# Altium PCB DIOT_Sampler.PCBDOC (part 1 of 8)
Units mm, origin at the board's own origin, x right, y up, seen from the top; angles counter-clockwise.
Board outline 221.17 x 100 mm, 4 copper layers (Top, GP1(GND), L3, Bot), stack 1.648 mm thick; 666 components, 413 nets, 2132 pads, 925 vias.
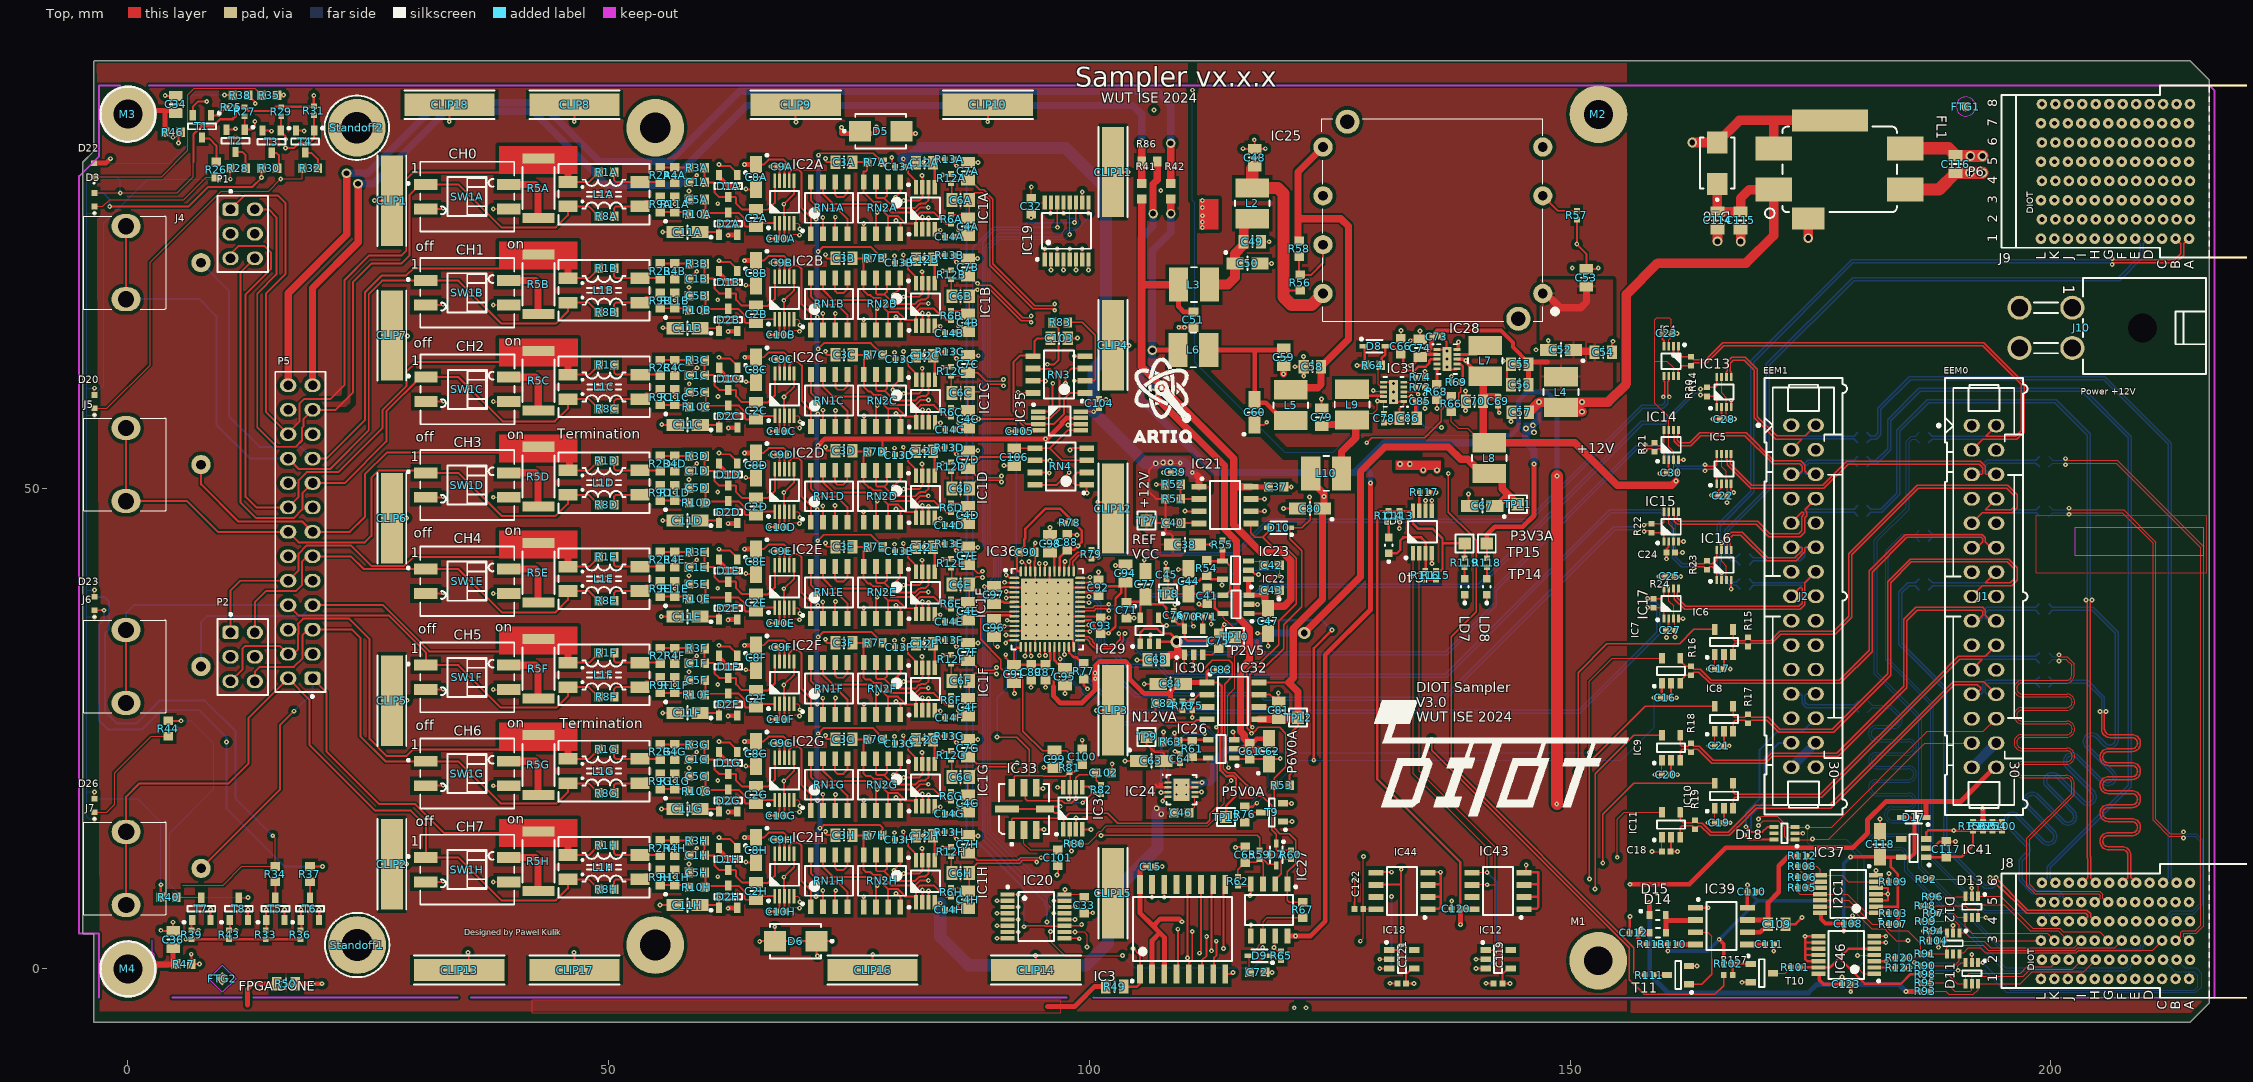
[diagram p0: Top view]
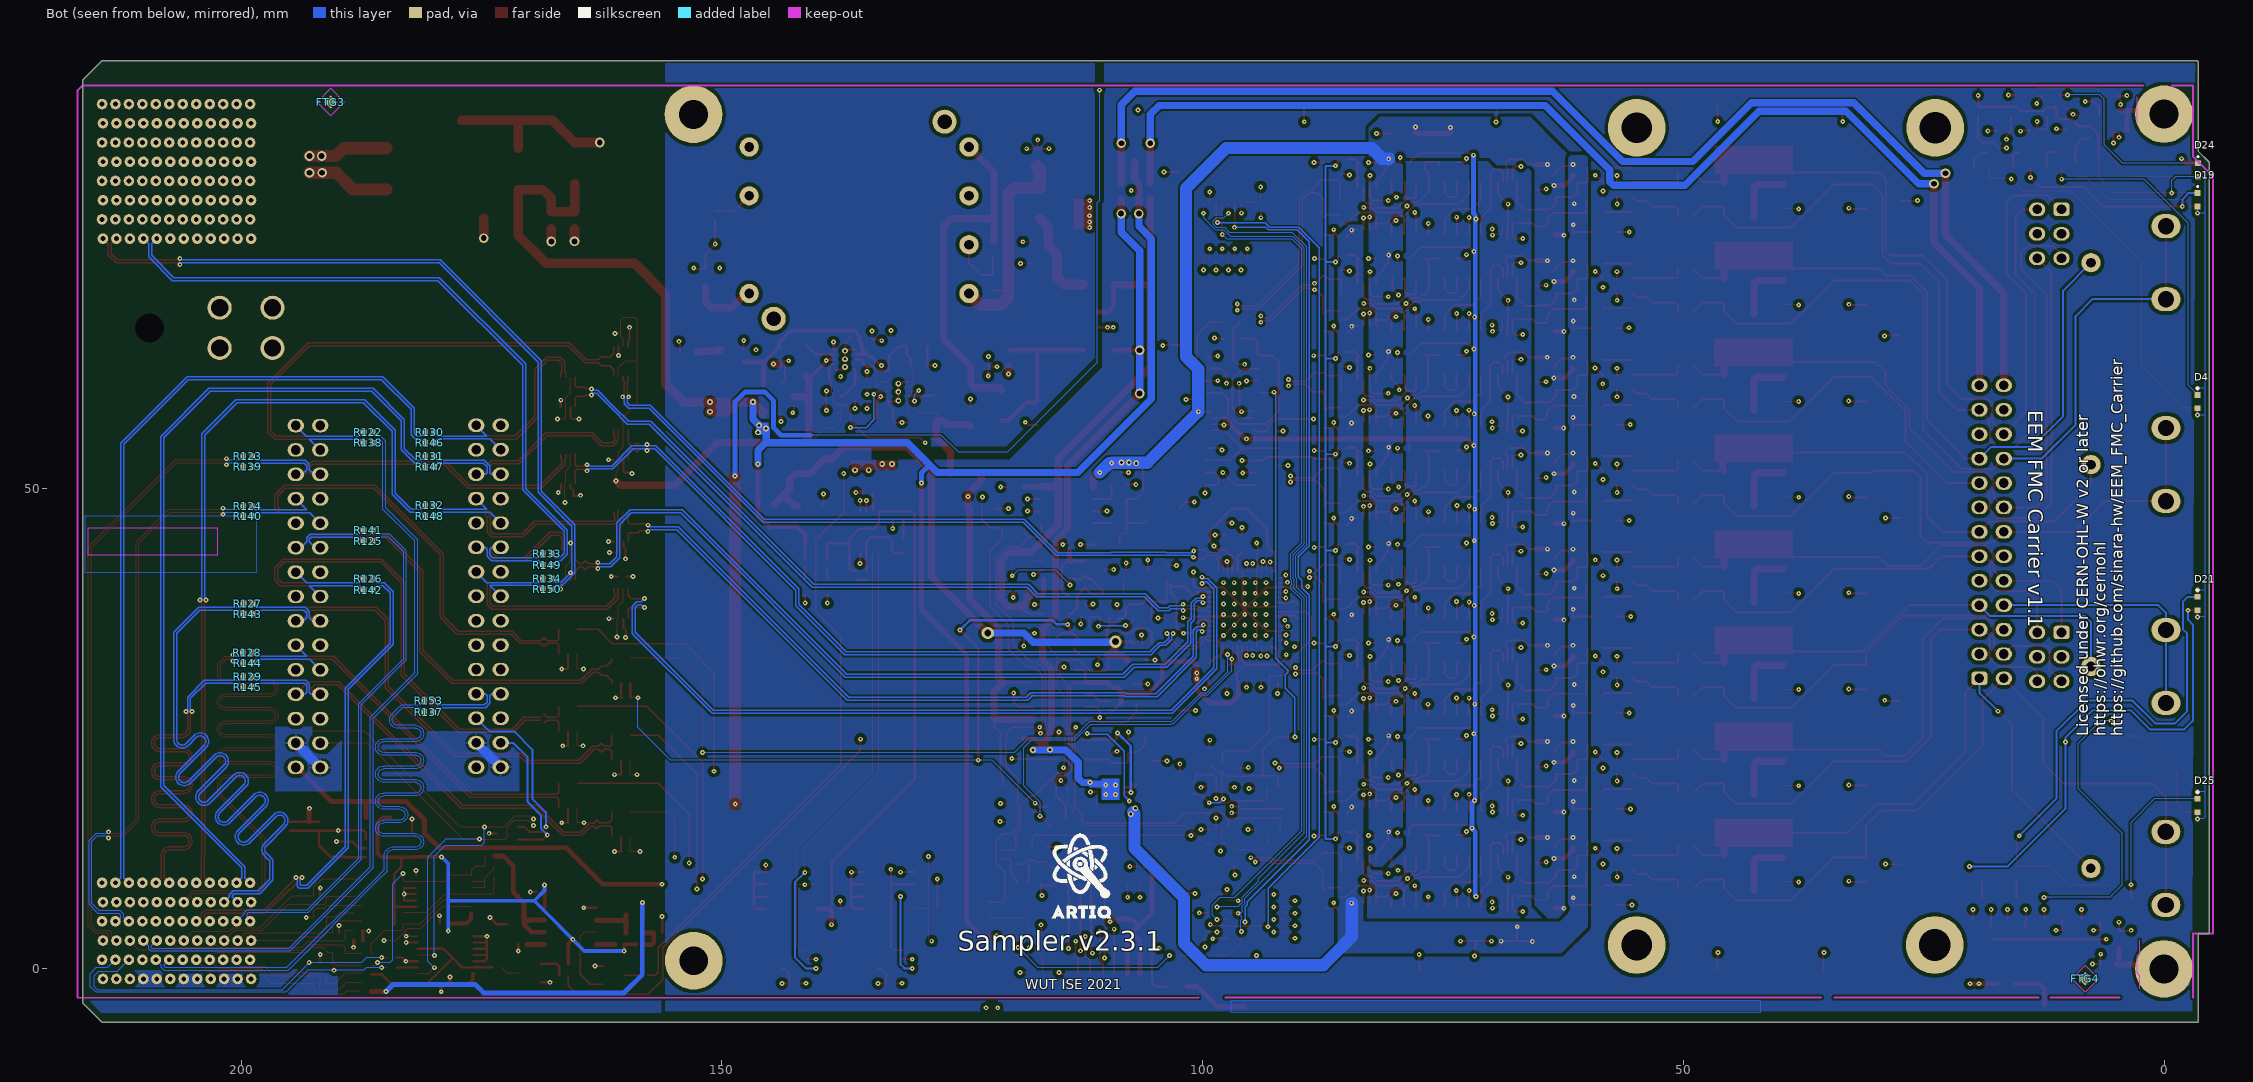
[diagram p1: Bot view, seen from below]
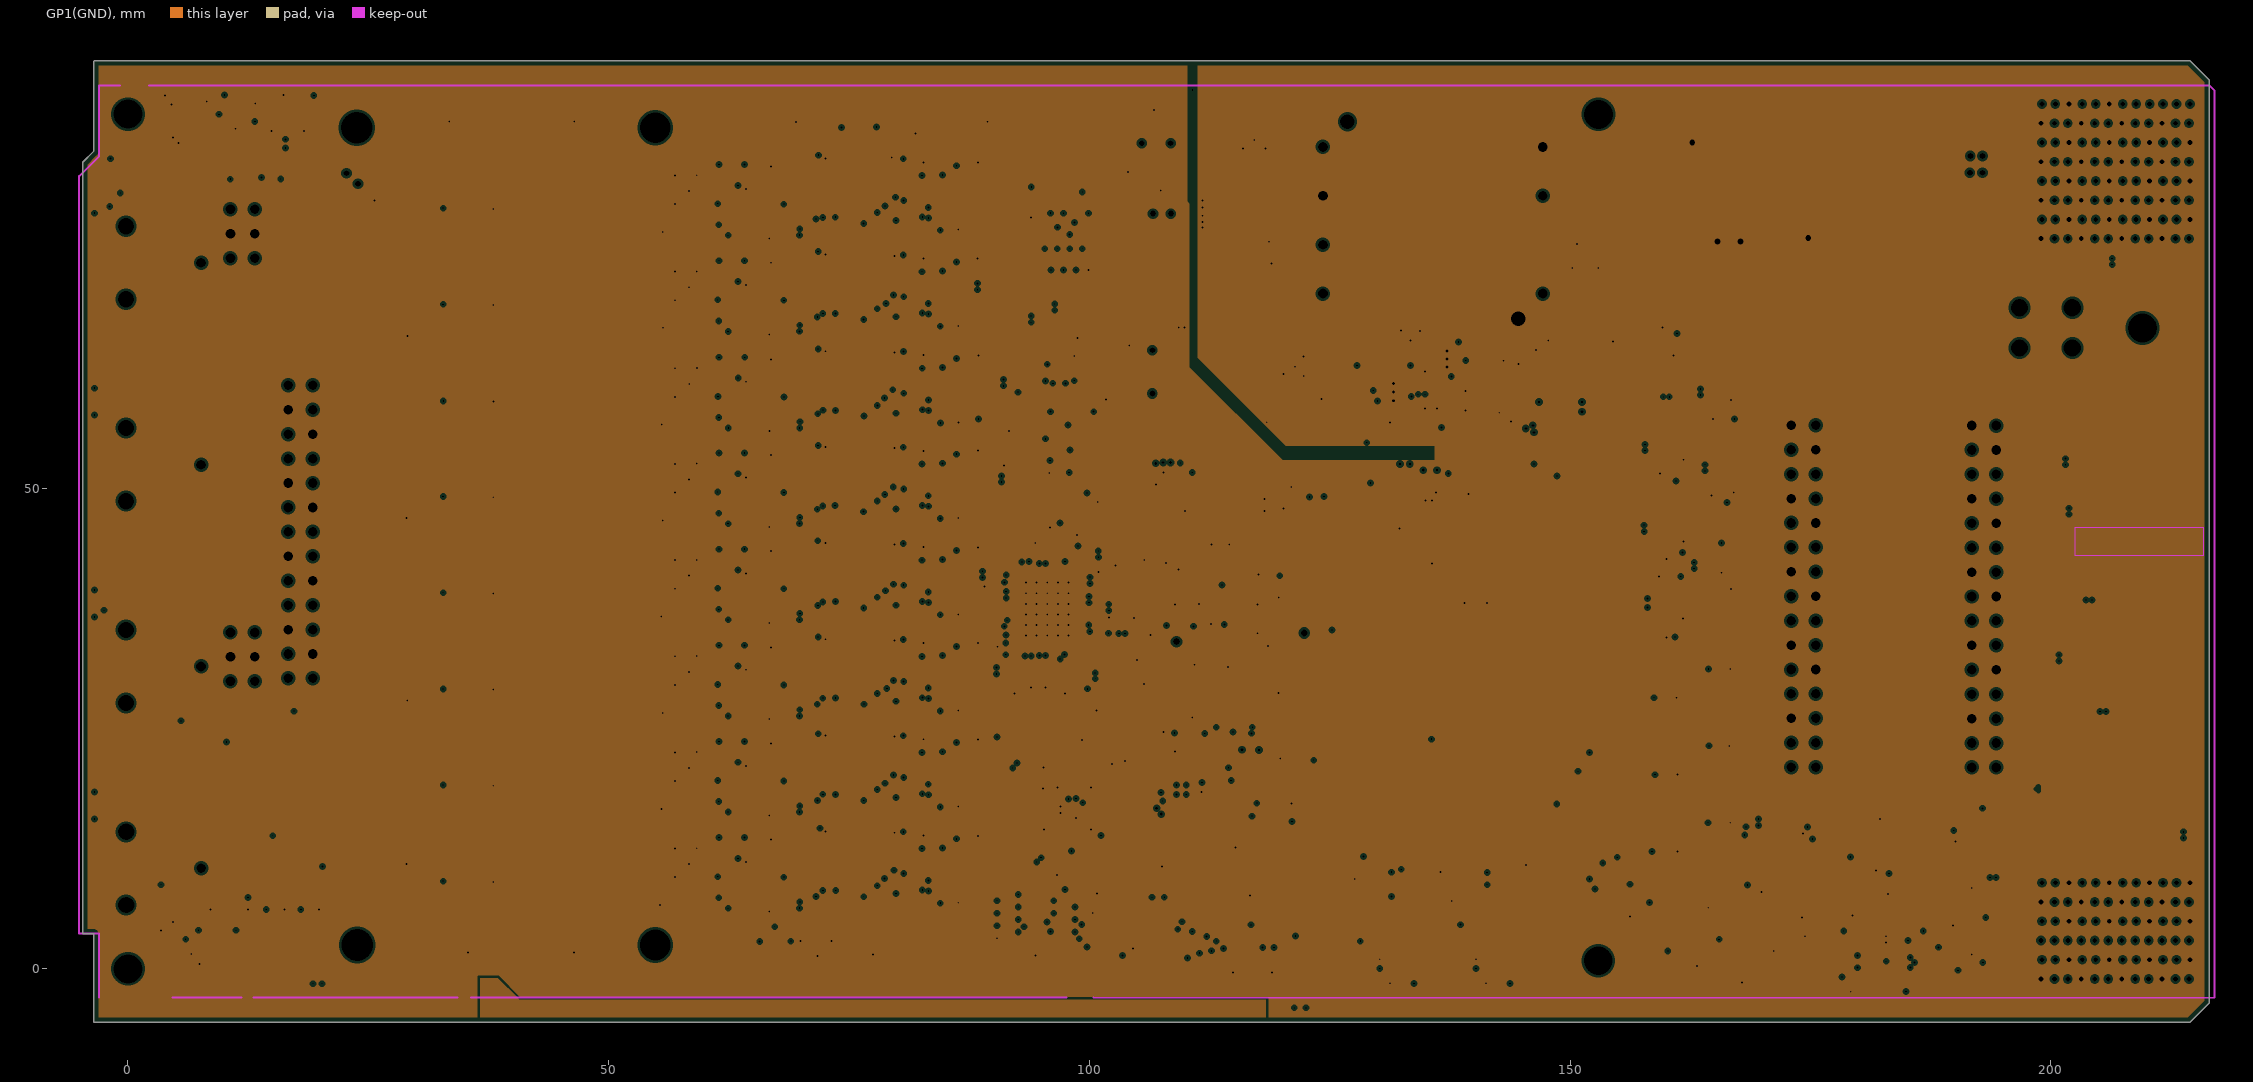
[diagram p2: GP1(GND), clearances drawn from the general rule]
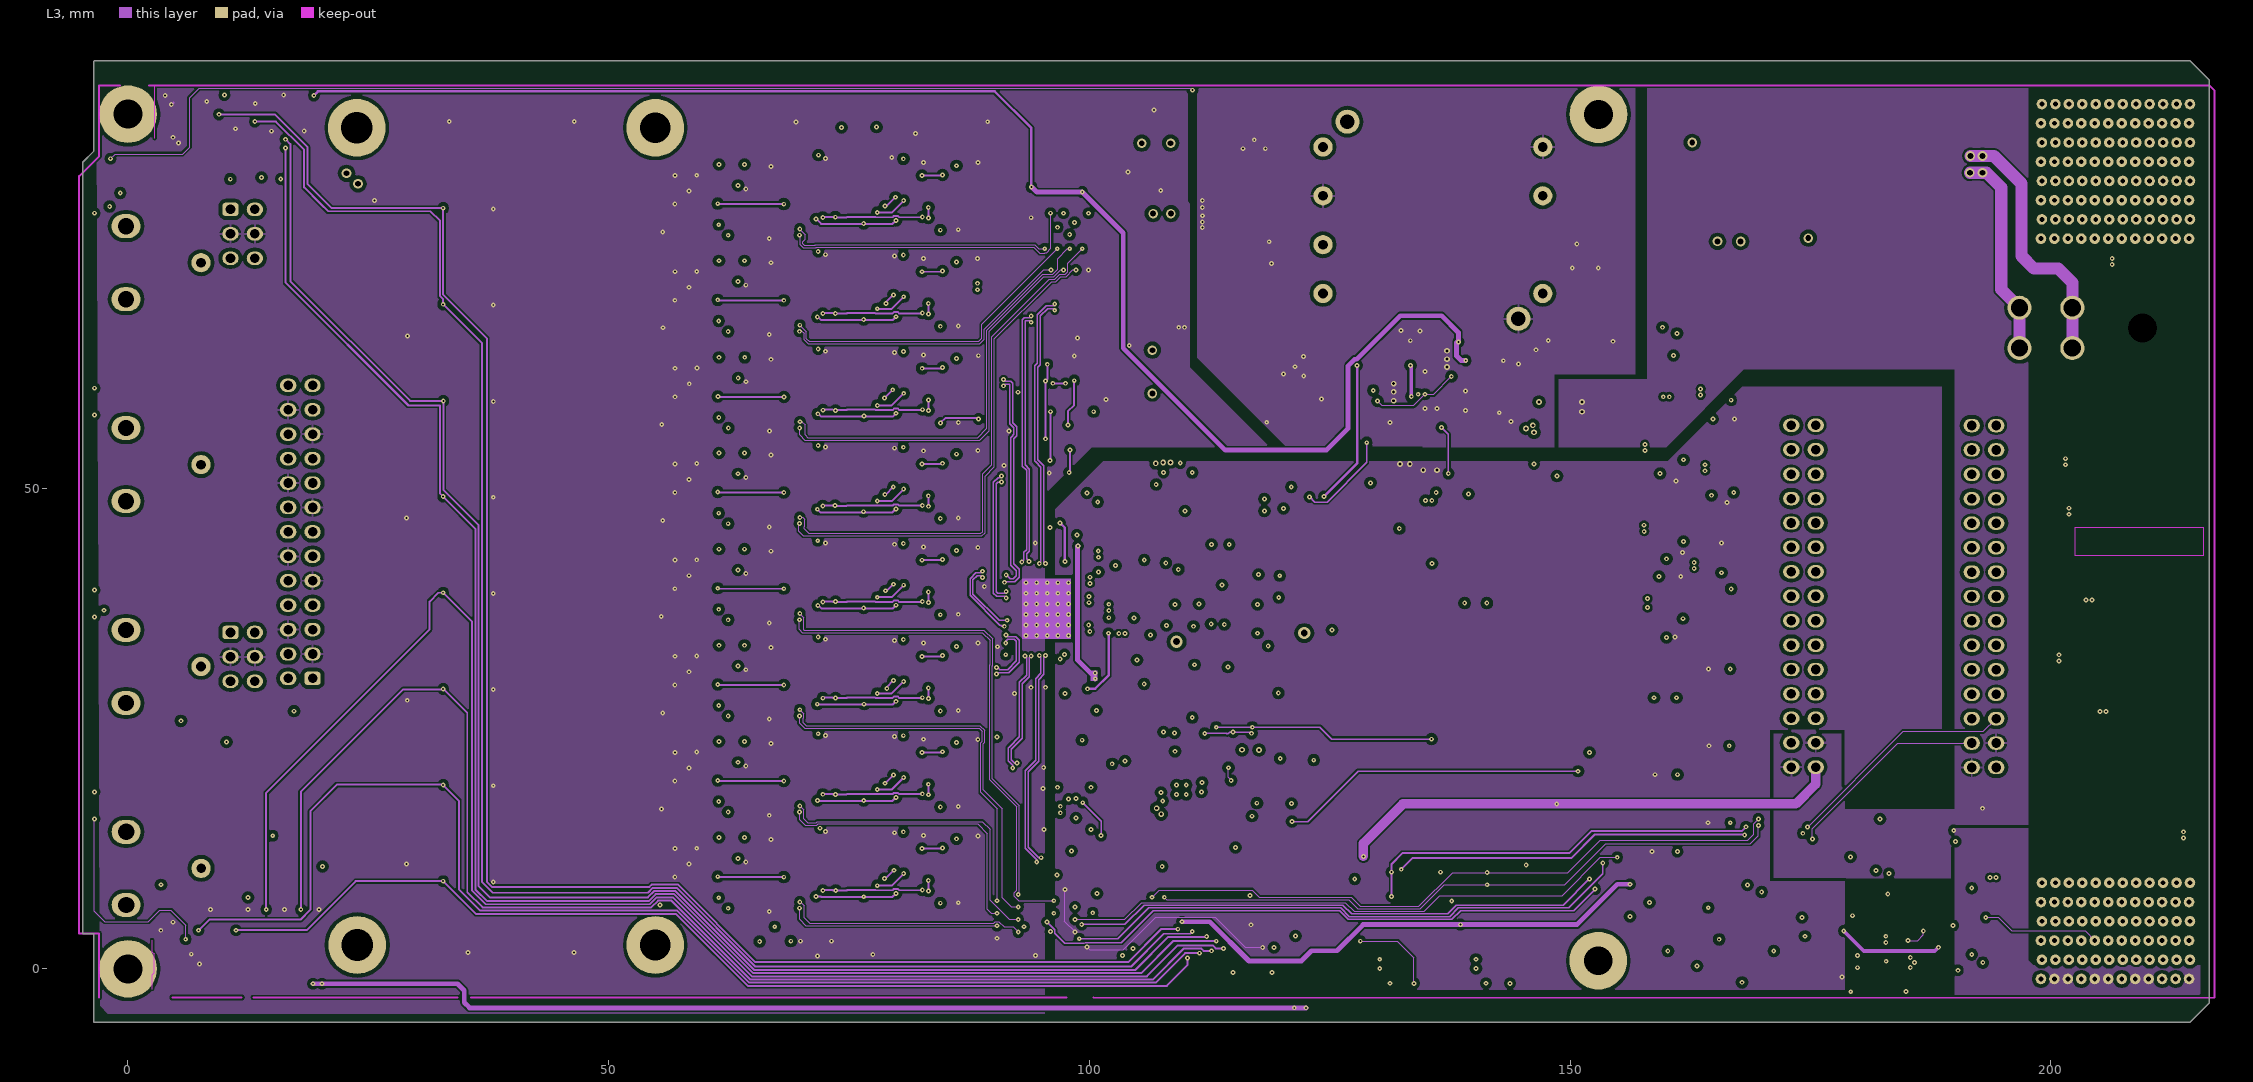
[diagram p3: L3]
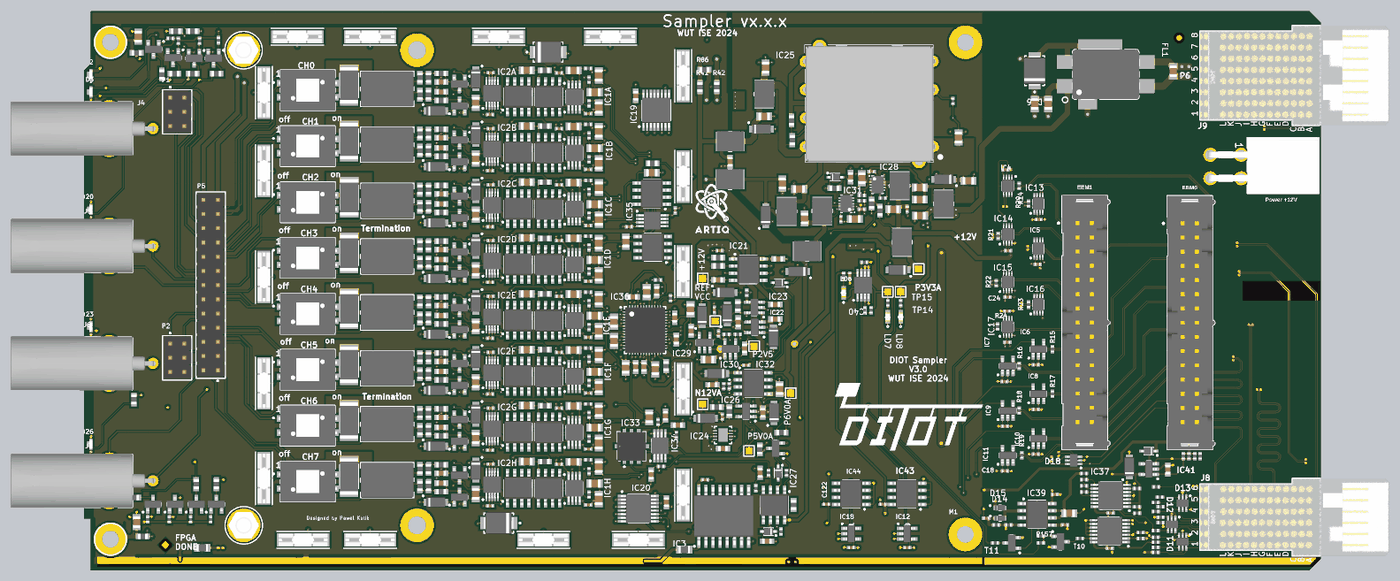
[diagram p10: 3D render of the assembled board from above, using the file's embedded part models]
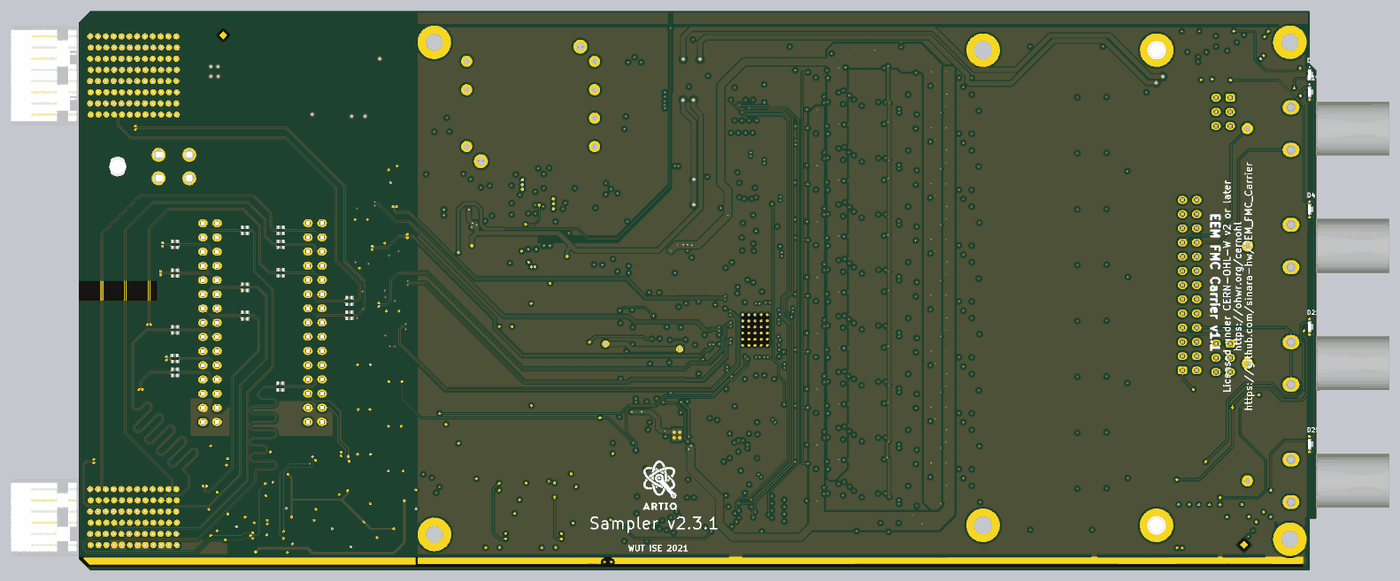
[diagram p11: 3D render of the assembled board from below, using the file's embedded part models]

## Layer stack, top to bottom
TopSolder: solder mask 0.0102, Solder Resist, Dk 3.5
Top: signal copper 0.058
Dielectric1: core 0.18, FR-4, Dk 4.8
GP1(GND): plane copper 0.036, net GND
Dielectric 3: prepreg 1.1, Dk 4.2
L3: signal copper 0.036
Dielectric2: core 0.18, FR-4, Dk 4.2
Bot: signal copper 0.058
BottomSolder: solder mask 0.0102, Solder Resist, Dk 3.5

## Board outline
-4.7,3.65 -4.7,82.695 -4.7,83.895 -3.57,85.025 -3.57,94.349 -3.469,94.45 214.469,94.45 216.469,92.45 216.469,-3.55 214.469,-5.55 -3.57,-5.55 -3.57,3.65

## Design rules (kind name [scope] priority, off if disabled: settings)
AcuteAngle [All] p1: minimum=6.00000000000000E+0001 checktracksonly=FALSE
Clearance Clearance_DIFF [(InDifferentialPairClass('All Differential Pairs'))] p1: gap=0.127 ignorepadtopadclearanceinfootprint=FALSE except(0: Arc-Hole Track-Hole SMDPad-Hole THPad-Hole Via-Hole Fill-Hole Poly-Hole Region-Hole Text-Hole; 0.254: Arc-Poly Track-Poly SMDPad-Poly THPad-Poly Via-Poly Fill-Poly Poly-Poly Poly-Region Poly-Text)
Clearance [All] p2: gap=0.127 ignorepadtopadclearanceinfootprint=FALSE except(0: Arc-Hole Track-Hole SMDPad-Hole THPad-Hole Via-Hole Fill-Hole Poly-Hole Region-Hole Text-Hole; 0.203: Track-Poly; 0.381: Arc-Poly SMDPad-Poly THPad-Poly Via-Poly Fill-Poly Poly-Poly)
ComponentClearance [All] p1 off: gap=0.254 collisioncheckmode=3 verticalgap=0.254 showdistances=FALSE
DiffPairsRouting [All] p1: maxlimit=0.178 minlimit=0.152 mostfreqgap=0.152 toplayer_minwidth=0.127 toplayer_maxwidth=0.152 toplayer_prefwidth=0.152 midlayer1_minwidth=0.127 midlayer1_maxwidth=0.152 midlayer1_prefwidth=0.152 bottomlayer_minwidth=0.127 bottomlayer_maxwidth=0.152 bottomlayer_prefwidth=0.152 maxuncoupledlength=12.7
FabricationTestPointUsage TestPointUsage [All] p1: valid=0 allowmultiple=FALSE
FabricationTestpoint Testpoint [All] p1: side=3 testpointundercomponent=TRUE minsize=1.016 maxsize=2.54 preferedsize=1.524 minholesize=0.508 maxholesize=1.016 preferedholesize=0.813 testpointgrid=0.025 allowsidetop=TRUE allowsidebottom=TRUE usegrid=TRUE gridtolerance=0
Height [All] p1 off: minheight=0 maxheight=25.4 prefheight=12.7
HoleSize [All] p1: absolutevalues=TRUE maxlimit=3.81 minlimit=0.025 maxpercent=80.000 minpercent=20.000
HoleToHoleClearance [All] p1: gap=0.025 allowstackedmicrovias=TRUE
MinimumSolderMaskSliver [All] p1: minsoldermaskwidth=0
PlaneClearance [All] p1: clearance=0.254
PlaneConnect [All] p1: planeconnectstyle=Direct reliefexpansion=0.508 reliefentries=4 reliefconductorwidth=0.254 reliefairgap=0.254
PolygonConnect "AirMax 2 Polygon" [All vs HasFootprint('AMPHENOL_10052825-101LF') or HasFootprint('AMPHENOL_10052838-101LF')] p1: connectstyle=Direct reliefconductorwidth=0.254 reliefentries=4 polygonreliefangle="90 Angle" airgapwidth=0.254
PolygonConnect PolygonConnect_pad [(InPadClass('All Pads'))] p2: connectstyle=Relief reliefconductorwidth=0.254 reliefentries=4 polygonreliefangle="90 Angle" airgapwidth=0.254
PolygonConnect [All] p3: connectstyle=Direct reliefconductorwidth=0.254 reliefentries=4 polygonreliefangle="45 Angle" airgapwidth=0.254
RoutingVias [All] p1: holewidth=0.2 width=0.5 viastyle="Through Hole" minholewidth=0.2 minwidth=0.5 maxholewidth=0.711 maxwidth=1.27
SilkToSilkClearance [All] p1: silktosilkclearance=0
SilkToSolderMaskClearance SilkscreenOverComponentPads [IsPad] p1: minsilkscreentomaskgap=0 clearancetoexposedcopper=TRUE
SolderMaskExpansion [All] p1: expansion=0.051 istentingtop=FALSE
SupplyNets "Schematic Supply Nets_1" [InNet('CHASSIS')] p1: voltage=0.000
SupplyNets "Schematic Supply Nets_8" [InNet('P3V3_MP2')] p2: voltage=0.000
SupplyNets "Schematic Supply Nets_26" [InNet('P13V0S')] p3: voltage=0.000
SupplyNets "Schematic Supply Nets_25" [InNet('N12V0A')] p4: voltage=0.000
SupplyNets "Schematic Supply Nets_24" [InNet('P12V0_DIOT')] p5: voltage=0.000
SupplyNets "Schematic Supply Nets_23" [InNet('P3V3_DIOT')] p6: voltage=0.000
SupplyNets "Schematic Supply Nets_21" [InNet('P13V0')] p7: voltage=0.000
SupplyNets "Schematic Supply Nets_20" [InNet('P3V3')] p8: voltage=0.000
SupplyNets "Schematic Supply Nets_19" [InNet('P5V0A')] p9: voltage=0.000
SupplyNets "Schematic Supply Nets_18" [InNet('P3V3_MP')] p10: voltage=0.000
SupplyNets "Schematic Supply Nets_16" [InNet('REF_P2V048')] p11: voltage=0.000
SupplyNets "Schematic Supply Nets_14" [InNet('REF_P1V7066')] p12: voltage=0.000
SupplyNets "Schematic Supply Nets_13" [InNet('P6V0A')] p13: voltage=0.000
SupplyNets "Schematic Supply Nets_11" [InNet('REF_VCC')] p14: voltage=0.000
SupplyNets "Schematic Supply Nets_10" [InNet('GND')] p15: voltage=0.000
SupplyNets "Schematic Supply Nets_9" [InNet('P2V5A')] p16: voltage=0.000
SupplyNets "Schematic Supply Nets_7" [InNet('N13V0')] p17: voltage=0.000
SupplyNets "Schematic Supply Nets_6" [InNet('P12V0A')] p18: voltage=0.000
SupplyNets "Schematic Supply Nets_5" [InNet('P3V3A')] p19: voltage=0.000
SupplyNets "Schematic Supply Nets_4" [InNet('N13V0S')] p20: voltage=0.000
SupplyNets "Schematic Supply Nets_3" [InNet('P12V0')] p21: voltage=0.000
SupplyNets "Schematic Supply Nets_2" [InNet('REF_P4V096')] p22: voltage=0.000
SupplyNets "Schematic Supply Nets" [InNet('P6V0')] p23: voltage=0.000
Width [All] p1: maxlimit=1.27 minlimit=0.127 preferedwidth=0.127
18 further rules are at their usual default settings.

## Classes and differential pairs
net class ADC: ADC_CLKOUT_N ADC_CLKOUT_P ADC_SCK_N ADC_SCK_P ADC_SDOA_N ADC_SDOA_P ADC_SDOB_N ADC_SDOB_P ADC_SDOC_N ADC_SDOC_P ADC_SDOD_N ADC_SDOD_P
net class I2C: BP_I2C.SCL BP_I2C.SDA EEM0_I2C.SCL EEM0_I2C.SDA I2C_SCL1 I2C_SDA1 Switch_I2C.SCL Switch_I2C.SDA
net class BS_LVDS: BP_IO.LVDS_N0 BP_IO.LVDS_N1 BP_IO.LVDS_N2 BP_IO.LVDS_N3 BP_IO.LVDS_N4 BP_IO.LVDS_N5 BP_IO.LVDS_N6 BP_IO.LVDS_N7 BP_IO.LVDS_N8 BP_IO.LVDS_N9 BP_IO.LVDS_N10 BP_IO.LVDS_N11 BP_IO.LVDS_N12 BP_IO.LVDS_N13 BP_IO.LVDS_N14 BP_IO.LVDS_N15 BP_IO.LVDS_P0 BP_IO.LVDS_P1 BP_IO.LVDS_P2 BP_IO.LVDS_P3 BP_IO.LVDS_P4 BP_IO.LVDS_P5 BP_IO.LVDS_P6 BP_IO.LVDS_P7 BP_IO.LVDS_P8 BP_IO.LVDS_P9 BP_IO.LVDS_P10 BP_IO.LVDS_P11 BP_IO.LVDS_P12 BP_IO.LVDS_P13 BP_IO.LVDS_P14 BP_IO.LVDS_P15
net class POWER: P2V5A P3V3 P3V3_DIOT P3V3_MP P3V3_MP2 P3V3A P5V0A P6V0 P6V0A P12V0 P12V0_DIOT P12V0A P13V0 P13V0S
net class LVDS_DUAL_P[0..4]: LVDS_DUAL_P0 LVDS_DUAL_P1 LVDS_DUAL_P2 LVDS_DUAL_P3 LVDS_DUAL_P4
net class LVDS_DUAL_N[0..4]: LVDS_DUAL_N0 LVDS_DUAL_N1 LVDS_DUAL_N2 LVDS_DUAL_N3 LVDS_DUAL_N4
net class SHARED_BUS_[0..4]: SHARED_BUS_0 SHARED_BUS_1 SHARED_BUS_2 SHARED_BUS_3 SHARED_BUS_4
net class GA[0..3]: GA0 GA1 GA2 GA3
net class EEM_IO.LVDS_P[0..15]: EEM_IO.LVDS_P5 EEM_IO.LVDS_P6 EEM_IO.LVDS_P7 EEM_IO.LVDS_P8 EEM_IO.LVDS_P9 EEM_IO.LVDS_P10 EEM_IO.LVDS_P11 EEM_IO.LVDS_P12 EEM_IO.LVDS_P13 EEM_IO.LVDS_P14 EEM_IO.LVDS_P15
net class EEM_IO.LVDS_N[0..15]: EEM_IO.LVDS_N5 EEM_IO.LVDS_N6 EEM_IO.LVDS_N7 EEM_IO.LVDS_N8 EEM_IO.LVDS_N9 EEM_IO.LVDS_N10 EEM_IO.LVDS_N11 EEM_IO.LVDS_N12 EEM_IO.LVDS_N13 EEM_IO.LVDS_N14 EEM_IO.LVDS_N15
net class BP_IO.LVDS_P[0..15]: BP_IO.LVDS_P0 BP_IO.LVDS_P1 BP_IO.LVDS_P2 BP_IO.LVDS_P3 BP_IO.LVDS_P4 BP_IO.LVDS_P5 BP_IO.LVDS_P6 BP_IO.LVDS_P7 BP_IO.LVDS_P8 BP_IO.LVDS_P9 BP_IO.LVDS_P10 BP_IO.LVDS_P11 BP_IO.LVDS_P12 BP_IO.LVDS_P13 BP_IO.LVDS_P14 BP_IO.LVDS_P15
net class BP_IO.LVDS_N[0..15]: BP_IO.LVDS_N0 BP_IO.LVDS_N1 BP_IO.LVDS_N2 BP_IO.LVDS_N3 BP_IO.LVDS_N4 BP_IO.LVDS_N5 BP_IO.LVDS_N6 BP_IO.LVDS_N7 BP_IO.LVDS_N8 BP_IO.LVDS_N9 BP_IO.LVDS_N10 BP_IO.LVDS_N11 BP_IO.LVDS_N12 BP_IO.LVDS_N13 BP_IO.LVDS_N14 BP_IO.LVDS_N15
component class U_PWR_Supply: C113 C114 C115 C116 C117 C118 D16 D17 FL1 IC40 IC41 J10 LD6 LD7 LD8 R114 R115 R116 R117 R118 R119 TP14 TP15
component class U_LVDS_EEM0: C15 C16 C17 C18 C19 C20 C21 C22 C23 C24 C25 C27 C28 C30 C119 C120 C121 C122 C123 D18 IC3 IC4 IC5 IC6 IC7 IC8 IC9 IC10 IC11 IC12 IC13 IC14 IC15 IC16 IC17 IC18 IC43 IC44 IC46 IC3000 IC3003 J1 J2 R14 R15 R16 R17 R18 R19 R20 R21 R22 R24 R100 R120 R121 R122 R123 R124 R125 R126 R127 R128 R129 R130 R131 R132 R133 R134 R137 R138 R139 R140 R141 R142 R143 R144 R145 R146 R147 R148 R149 R150 R153 R154 R155 R156
component class CPCIS_Connectors_P1_P6: C108 C109 C110 C111 C112 D11 D12 D13 D14 D15 IC37 IC39 J8 J9 R48 R90 R91 R92 R93 R94 R95 R96 R97 R98 R99 R101 R102 R103 R104 R105 R106 R107 R108 R109 R110 R111 R112 R113 T10 T11
net class TERM_STAT[7..0]: TERM_STAT0 TERM_STAT1 TERM_STAT2 TERM_STAT3 TERM_STAT4 TERM_STAT5 TERM_STAT6 TERM_STAT7
channel class Input_channel: U_Input_channel1 U_Input_channel2 U_Input_channel3 U_Input_channel4 U_Input_channel5 U_Input_channel6 U_Input_channel7 U_Input_channel8
component class U_Supply: C37 C38 C39 C40 C41 C42 C43 C44 C45 C46 C47 C48 C49 C50 C51 C52 C53 C54 C55 C56 C57 C58 C59 C60 C61 C62 C63 C64 C65 C66 C67 C68 C69 C70 C71 C72 C73 C74 C75 C76 C77 C78 C79 C80 C81 C82 C83 C84 C85 C86 D5 D6 D7 D8 D9 D10 IC21 IC22 IC23 IC24 IC25 IC26 IC27 IC28 IC29 IC30 IC31 IC32 L2 L3 L4 L5 L6 L7 L8 L9 L10 R51 R52 R53 R54 R55 R56 R57 R58 R59 R60 R61 R62 R63 R64 R65 R66 R67 R68 R69 R70 R71 R72 R73 R74 R75 R157 TP7 TP8 TP9 TP10 TP11 TP12 TP13
component class U_Input_channel8: C1H C2H C3H C4H C5H C6H C7H C8H C9H C10H C11H C12H C13H C14H D1H D2H IC1H IC2H L1H R1H R2H R3H R4H R5H R6H R7H R8H R9H R10H R11H R12H R13H RN1H RN2H SW1H
component class U_Input_channel7: C1G C2G C3G C4G C5G C6G C7G C8G C9G C10G C11G C12G C13G C14G D1G D2G IC1G IC2G L1G R1G R2G R3G R4G R5G R6G R7G R8G R9G R10G R11G R12G R13G RN1G RN2G SW1G
component class U_Input_channel6: C1F C2F C3F C4F C5F C6F C7F C8F C9F C10F C11F C12F C13F C14F D1F D2F IC1F IC2F L1F R1F R2F R3F R4F R5F R6F R7F R8F R9F R10F R11F R12F R13F RN1F RN2F SW1F
component class U_Input_channel5: C1E C2E C3E C4E C5E C6E C7E C8E C9E C10E C11E C12E C13E C14E D1E D2E IC1E IC2E L1E R1E R2E R3E R4E R5E R6E R7E R8E R9E R10E R11E R12E R13E RN1E RN2E SW1E
component class U_Input_channel4: C1D C2D C3D C4D C5D C6D C7D C8D C9D C10D C11D C12D C13D C14D D1D D2D IC1D IC2D L1D R1D R2D R3D R4D R5D R6D R7D R8D R9D R10D R11D R12D R13D RN1D RN2D SW1D
component class U_Input_channel3: C1C C2C C3C C4C C5C C6C C7C C8C C9C C10C C11C C12C C13C C14C D1C D2C IC1C IC2C L1C R1C R2C R3C R4C R5C R6C R7C R8C R9C R10C R11C R12C R13C RN1C RN2C SW1C
component class U_Input_channel2: C1B C2B C3B C4B C5B C6B C7B C8B C9B C10B C11B C12B C13B C14B D1B D2B IC1B IC2B L1B R1B R2B R3B R4B R5B R6B R7B R8B R9B R10B R11B R12B R13B RN1B RN2B SW1B
component class U_Input_channel1: C1A C2A C3A C4A C5A C6A C7A C8A C9A C10A C11A C12A C13A C14A D1A D2A IC1A IC2A L1A R1A R2A R3A R4A R5A R6A R7A R8A R9A R10A R11A R12A R13A RN1A RN2A SW1A
component class U_ADC_8CH: C87 C88 C89 C90 C91 C92 C93 C94 C95 C96 C97 C98 C99 C100 C101 C102 C103 C104 C105 C106 IC33 IC34 IC35 IC36 R76 R77 R78 R79 R80 R81 R82 R83 RN3 RN4 T9
component class Sampler: C32 C33 C34 C36 CLIP1 CLIP2 CLIP3 CLIP4 CLIP5 CLIP6 CLIP7 CLIP8 CLIP9 CLIP10 CLIP11 CLIP12 CLIP13 CLIP14 CLIP15 CLIP16 CLIP17 CLIP18 D3 D4 D19 D20 D21 D22 D23 D24 D25 D26 FTG1 FTG2 FTG3 FTG4 IC19 IC20 J4 J5 J6 J7 M1 M2 M3 M4 NUT1 NUT2 P1 P2 P5 R25 R26 R27 R28 R29 R30 R31 R32 R33 R34 R35 R36 R37 R38 R39 R40 R41 R42 R43 R44 R46 R47 R49 R50 R86 SCREW1 SCREW2 Standoff1 Standoff2 T1 T2 T3 T4 T5 T6 T7 T8 WASHER1 WASHER2 WASHER3 WASHER4
differential pair EEM_IO.LVDS15: +EEM_IO.LVDS_P15 -EEM_IO.LVDS_N15
differential pair EEM_IO.LVDS14: +EEM_IO.LVDS_P14 -EEM_IO.LVDS_N14
differential pair EEM_IO.LVDS13: +EEM_IO.LVDS_P13 -EEM_IO.LVDS_N13
differential pair EEM_IO.LVDS12: +EEM_IO.LVDS_P12 -EEM_IO.LVDS_N12
differential pair EEM_IO.LVDS11: +EEM_IO.LVDS_P11 -EEM_IO.LVDS_N11
differential pair EEM_IO.LVDS5: +EEM_IO.LVDS_P5 -EEM_IO.LVDS_N5
differential pair EEM_IO.LVDS4: +EEM_IO.LVDS_P9 -EEM_IO.LVDS_N9
differential pair EEM_IO.LVDS3: +EEM_IO.LVDS_P8 -EEM_IO.LVDS_N8
differential pair EEM_IO.LVDS2: +EEM_IO.LVDS_P7 -EEM_IO.LVDS_N7
differential pair EEM_IO.LVDS1: +EEM_IO.LVDS_P6 -EEM_IO.LVDS_N6
differential pair LVDS_DUAL4: +LVDS_DUAL_P4 -LVDS_DUAL_N4
differential pair LVDS_DUAL3: +LVDS_DUAL_P3 -LVDS_DUAL_N3
differential pair LVDS_DUAL2: +LVDS_DUAL_P2 -LVDS_DUAL_N2
differential pair LVDS_DUAL1: +LVDS_DUAL_P1 -LVDS_DUAL_N1
differential pair LVDS_DUAL0: +LVDS_DUAL_P0 -LVDS_DUAL_N0
differential pair PE_CLK: +PE_CLK_P -PE_CLK_N
differential pair EEM_IO.LVDS10: +EEM_IO.LVDS_P10 -EEM_IO.LVDS_N10
differential pair BP_MGT_Tx: +BP_MGT_Tx_P -BP_MGT_Tx_N
differential pair BP_MGT_Rx: +BP_MGT_Rx_P -BP_MGT_Rx_N
differential pair BP_IO.LVDS15: +BP_IO.LVDS_P15 -BP_IO.LVDS_N15
differential pair BP_IO.LVDS14: +BP_IO.LVDS_P14 -BP_IO.LVDS_N14
differential pair BP_IO.LVDS13: +BP_IO.LVDS_P13 -BP_IO.LVDS_N13
differential pair BP_IO.LVDS12: +BP_IO.LVDS_P12 -BP_IO.LVDS_N12
differential pair BP_IO.LVDS11: +BP_IO.LVDS_P11 -BP_IO.LVDS_N11
differential pair BP_IO.LVDS10: +BP_IO.LVDS_P10 -BP_IO.LVDS_N10
differential pair BP_IO.LVDS9: +BP_IO.LVDS_P9 -BP_IO.LVDS_N9
differential pair BP_IO.LVDS8: +BP_IO.LVDS_P8 -BP_IO.LVDS_N8
differential pair BP_IO.LVDS7: +BP_IO.LVDS_P7 -BP_IO.LVDS_N7
differential pair BP_IO.LVDS6: +BP_IO.LVDS_P6 -BP_IO.LVDS_N6
differential pair BP_IO.LVDS5: +BP_IO.LVDS_P5 -BP_IO.LVDS_N5
differential pair BP_IO.LVDS4: +BP_IO.LVDS_P4 -BP_IO.LVDS_N4
differential pair BP_IO.LVDS3: +BP_IO.LVDS_P3 -BP_IO.LVDS_N3
differential pair BP_IO.LVDS2: +BP_IO.LVDS_P2 -BP_IO.LVDS_N2
differential pair BP_IO.LVDS1: +BP_IO.LVDS_P1 -BP_IO.LVDS_N1
differential pair BP_IO.LVDS0: +BP_IO.LVDS_P0 -BP_IO.LVDS_N0
differential pair ADC_CLKOUT: +ADC_CLKOUT_P -ADC_CLKOUT_N
differential pair ADC_SCK: +ADC_SCK_P -ADC_SCK_N
differential pair ADC_SDOA: +ADC_SDOA_P -ADC_SDOA_N
differential pair ADC_SDOB: +ADC_SDOB_P -ADC_SDOB_N
differential pair ADC_SDOC: +ADC_SDOC_P -ADC_SDOC_N
differential pair ADC_SDOD: +ADC_SDOD_P -ADC_SDOD_N
differential pair IN_0: +IN_0_P -IN_0_N
differential pair IN_1: +IN_1_P -IN_1_N
differential pair IN_2: +IN_2_P -IN_2_N
differential pair IN_3: +IN_3_P -IN_3_N
differential pair IN_4: +IN_4_P -IN_4_N
differential pair IN_5: +IN_5_P -IN_5_N
differential pair IN_6: +IN_6_P -IN_6_N
differential pair IN_7: +IN_7_P -IN_7_N

## Components (designator, comment, footprint, x,y, rotation, side; value= is the part's Value field where it differs from the comment)
C1A "18pF" CAPC1608X87N 59.162,81.798 r0 top (schematic designator C1)
C1B "18pF" CAPC1608X87N 59.162,71.798 r0 top (schematic designator C1)
C1C "18pF" CAPC1608X87N 59.175,61.754 r0 top (schematic designator C1)
C1D "18pF" CAPC1608X87N 59.162,51.798 r0 top (schematic designator C1)
C1E "18pF" CAPC1608X87N 59.162,41.798 r0 top (schematic designator C1)
C1F "18pF" CAPC1608X87N 59.162,31.798 r0 top (schematic designator C1)
C1G "18pF" CAPC1608X87N 59.162,21.798 r0 top (schematic designator C1)
C1H "18pF" CAPC1608X87N 59.162,11.798 r0 top (schematic designator C1)
C2A "82pF" CAPC2012X90N 65.329,78.09 r90 top (schematic designator C2)
C2B "82pF" CAPC2012X90N 65.329,68.09 r90 top (schematic designator C2)
C2C "82pF" CAPC2012X90N 65.341,58.047 r90 top (schematic designator C2)
C2D "82pF" CAPC2012X90N 65.329,48.09 r90 top (schematic designator C2)
C2E "82pF" CAPC2012X90N 65.329,38.09 r90 top (schematic designator C2)
C2F "82pF" CAPC2012X90N 65.329,28.09 r90 top (schematic designator C2)
C2G "82pF" CAPC2012X90N 65.329,18.09 r90 top (schematic designator C2)
C2H "82pF" CAPC2012X90N 65.329,8.09 r90 top (schematic designator C2)
C3A "47nF" CAPC2012X135N 74.469,83.905 r0 top (schematic designator C3)
C3B "47nF" CAPC2012X135N 74.469,73.905 r0 top (schematic designator C3)
C3C "47nF" CAPC2012X135N 74.482,63.861 r0 top (schematic designator C3)
C3D "47nF" CAPC2012X135N 74.469,53.905 r0 top (schematic designator C3)
C3E "47nF" CAPC2012X135N 74.469,43.905 r0 top (schematic designator C3)
C3F "47nF" CAPC2012X135N 74.469,33.905 r0 top (schematic designator C3)
C3G "47nF" CAPC2012X135N 74.469,23.905 r0 top (schematic designator C3)
C3H "47nF" CAPC2012X135N 74.469,13.905 r0 top (schematic designator C3)
C4A "2.2nF" CAPC2013X100N 87.353,77.206 r90 top (schematic designator C4)
C4B "2.2nF" CAPC2013X100N 87.353,67.206 r90 top (schematic designator C4)
C4C "2.2nF" CAPC2013X100N 87.366,57.162 r90 top (schematic designator C4)
C4D "2.2nF" CAPC2013X100N 87.353,47.206 r90 top (schematic designator C4)
C4E "2.2nF" CAPC2013X100N 87.353,37.206 r90 top (schematic designator C4)
C4F "2.2nF" CAPC2013X100N 87.353,27.206 r90 top (schematic designator C4)
C4G "2.2nF" CAPC2013X100N 87.353,17.206 r90 top (schematic designator C4)
C4H "2.2nF" CAPC2013X100N 87.353,7.206 r90 top (schematic designator C4)
C5A "18pF" CAPC1608X87N 59.162,80.02 r0 top (schematic designator C5)
C5B "18pF" CAPC1608X87N 59.162,70.02 r0 top (schematic designator C5)
C5C "18pF" CAPC1608X87N 59.175,59.976 r0 top (schematic designator C5)
C5D "18pF" CAPC1608X87N 59.162,50.02 r0 top (schematic designator C5)
C5E "18pF" CAPC1608X87N 59.162,40.02 r0 top (schematic designator C5)
C5F "18pF" CAPC1608X87N 59.162,30.02 r0 top (schematic designator C5)
C5G "18pF" CAPC1608X87N 59.162,20.02 r0 top (schematic designator C5)
C5H "18pF" CAPC1608X87N 59.162,10.02 r0 top (schematic designator C5)
C6A "2.2nF" CAPC2013X100N 86.603,79.956 r0 top (schematic designator C6)
C6B "2.2nF" CAPC2013X100N 86.603,69.956 r0 top (schematic designator C6)
C6C "2.2nF" CAPC2013X100N 86.616,59.912 r0 top (schematic designator C6)
C6D "2.2nF" CAPC2013X100N 86.603,49.956 r0 top (schematic designator C6)
C6E "2.2nF" CAPC2013X100N 86.603,39.956 r0 top (schematic designator C6)
C6F "2.2nF" CAPC2013X100N 86.603,29.956 r0 top (schematic designator C6)
C6G "2.2nF" CAPC2013X100N 86.603,19.956 r0 top (schematic designator C6)
C6H "2.2nF" CAPC2013X100N 86.603,9.956 r0 top (schematic designator C6)
C7A "2.2nF" CAPC2013X100N 87.353,82.956 r90 top (schematic designator C7)
C7B "2.2nF" CAPC2013X100N 87.353,72.956 r90 top (schematic designator C7)
C7C "2.2nF" CAPC2013X100N 87.366,62.912 r90 top (schematic designator C7)
C7D "2.2nF" CAPC2013X100N 87.353,52.956 r90 top (schematic designator C7)
C7E "2.2nF" CAPC2013X100N 87.353,42.956 r90 top (schematic designator C7)
C7F "2.2nF" CAPC2013X100N 87.353,32.956 r90 top (schematic designator C7)
C7G "2.2nF" CAPC2013X100N 87.353,22.956 r90 top (schematic designator C7)
C7H "2.2nF" CAPC2013X100N 87.353,12.956 r90 top (schematic designator C7)
C8A "10uF" CAPMP3216X180N 65.329,82.358 r270 top (schematic designator C8)
C8B "10uF" CAPMP3216X180N 65.329,72.358 r270 top (schematic designator C8)
C8C "10uF" CAPMP3216X180N 65.341,62.314 r270 top (schematic designator C8)
C8D "10uF" CAPMP3216X180N 65.329,52.358 r270 top (schematic designator C8)
C8E "10uF" CAPMP3216X180N 65.329,42.358 r270 top (schematic designator C8)
C8F "10uF" CAPMP3216X180N 65.329,32.358 r270 top (schematic designator C8)
C8G "10uF" CAPMP3216X180N 65.329,22.358 r270 top (schematic designator C8)
C8H "10uF" CAPMP3216X180N 65.329,12.358 r270 top (schematic designator C8)
C9A "100nF" CAPC1005X55N 68.015,83.448 r0 top (schematic designator C9)
C9B "100nF" CAPC1005X55N 68.015,73.448 r0 top (schematic designator C9)
C9C "100nF" CAPC1005X55N 68.028,63.404 r0 top (schematic designator C9)
C9D "100nF" CAPC1005X55N 68.015,53.448 r0 top (schematic designator C9)
C9E "100nF" CAPC1005X55N 68.015,43.448 r0 top (schematic designator C9)
C9F "100nF" CAPC1005X55N 68.015,33.448 r0 top (schematic designator C9)
C9G "100nF" CAPC1005X55N 68.015,23.448 r0 top (schematic designator C9)
C9H "100nF" CAPC1005X55N 68.015,13.448 r0 top (schematic designator C9)
C10A "100nF" CAPC1005X55N 67.915,75.948 r0 top (schematic designator C10)
C10B "100nF" CAPC1005X55N 67.915,65.948 r0 top (schematic designator C10)
C10C "100nF" CAPC1005X55N 67.928,55.904 r0 top (schematic designator C10)
C10D "100nF" CAPC1005X55N 67.915,45.948 r0 top (schematic designator C10)
C10E "100nF" CAPC1005X55N 67.915,35.948 r0 top (schematic designator C10)
C10F "100nF" CAPC1005X55N 67.915,25.948 r0 top (schematic designator C10)
C10G "100nF" CAPC1005X55N 67.915,15.948 r0 top (schematic designator C10)
C10H "100nF" CAPC1005X55N 67.915,5.948 r0 top (schematic designator C10)
C11A "10uF" CAPMP3216X180N 58.194,76.63 r0 top (schematic designator C11)
C11B "10uF" CAPMP3216X180N 58.194,66.63 r0 top (schematic designator C11)
C11C "10uF" CAPMP3216X180N 58.207,56.586 r0 top (schematic designator C11)
C11D "10uF" CAPMP3216X180N 58.194,46.63 r0 top (schematic designator C11)
C11E "10uF" CAPMP3216X180N 58.194,36.63 r0 top (schematic designator C11)
C11F "10uF" CAPMP3216X180N 58.194,26.63 r0 top (schematic designator C11)
C11G "10uF" CAPMP3216X180N 58.194,16.63 r0 top (schematic designator C11)
C11H "10uF" CAPMP3216X180N 58.194,6.63 r0 top (schematic designator C11)
C12A "47nF" CAPC2012X135N 82.844,83.83 r0 top (schematic designator C12)
C12B "47nF" CAPC2012X135N 82.844,73.83 r0 top (schematic designator C12)
C12C "47nF" CAPC2012X135N 82.857,63.786 r0 top (schematic designator C12)
C12D "47nF" CAPC2012X135N 82.844,53.83 r0 top (schematic designator C12)
C12E "47nF" CAPC2012X135N 82.844,43.83 r0 top (schematic designator C12)
C12F "47nF" CAPC2012X135N 82.844,33.83 r0 top (schematic designator C12)
C12G "47nF" CAPC2012X135N 82.844,23.83 r0 top (schematic designator C12)
C12H "47nF" CAPC2012X135N 82.844,13.83 r0 top (schematic designator C12)
C13A "100nF" CAPC1005X55N 80.244,83.43 r0 top (schematic designator C13)
C13B "100nF" CAPC1005X55N 80.244,73.43 r0 top (schematic designator C13)
C13C "100nF" CAPC1005X55N 80.257,63.386 r0 top (schematic designator C13)
C13D "100nF" CAPC1005X55N 80.244,53.43 r0 top (schematic designator C13)
C13E "100nF" CAPC1005X55N 80.244,43.43 r0 top (schematic designator C13)
C13F "100nF" CAPC1005X55N 80.244,33.43 r0 top (schematic designator C13)
C13G "100nF" CAPC1005X55N 80.244,23.43 r0 top (schematic designator C13)
C13H "100nF" CAPC1005X55N 80.244,13.43 r0 top (schematic designator C13)
C14A "100nF" CAPC1005X55N 85.444,76.13 r180 top (schematic designator C14)
C14B "100nF" CAPC1005X55N 85.444,66.13 r180 top (schematic designator C14)
C14C "100nF" CAPC1005X55N 85.457,56.086 r180 top (schematic designator C14)
C14D "100nF" CAPC1005X55N 85.444,46.13 r180 top (schematic designator C14)
C14E "100nF" CAPC1005X55N 85.444,36.13 r180 top (schematic designator C14)
C14F "100nF" CAPC1005X55N 85.444,26.13 r180 top (schematic designator C14)
C14G "100nF" CAPC1005X55N 85.444,16.13 r180 top (schematic designator C14)
C14H "100nF" CAPC1005X55N 85.444,6.13 r180 top (schematic designator C14)
C15 "100nF" CAPC1005X55N 106.369,10.63 r180 top
C16 "100nF" CAPC1005X55N 159.9,28.2 r180 top
C17 "100nF" CAPC1005X55N 165.5,31.2 r180 top
C18 "100nF" CAPC1005X55N 160,12.2 r180 top
C19 "100nF" CAPC1005X55N 165.5,15.2 r180 top
C20 "100nF" CAPC1005X55N 160,20.2 r180 top
C21 "100nF" CAPC1005X55N 165.5,23.2 r180 top
C22 "100nF" CAPC1005X55N 165.868,49.188 r0 top
C23 "100nF" CAPC1005X55N 160.05,66.1 r0 top
C24 "100nF" CAPC1005X55N 160.462,43.305 r0 top
C25 "100nF" CAPC1005X55N 160.373,40.818 r0 top
C27 "100nF" CAPC1005X55N 160.417,35.222 r0 top
C28 "100nF" CAPC1005X55N 166.014,57.185 r0 top
C30 "100nF" CAPC1005X55N 160.538,51.62 r0 top
C32 "100nF" CAPC1608X87N 93.957,79.336 r90 top
C33 "100nF" CAPC1608X87N 99.444,6.63 r90 top
C34 "Undefined" CAPC2012X135N 4.953,89.905 r90 top
C36 "Undefined" CAPC2012X135N 4.694,3.055 r90 top
C37 "1uF" CAPC1608X87N 119.444,50.13 r180 top
C38 "10uF" CAPMP3216X180N 109.944,44.13 r0 top
C39 "100nF" CAPC1005X55N 108.944,51.63 r0 top
C40 "10nF" CAPC1608X87N 108.694,46.38 r180 top
C41 "1uF" CAPC1608X87N 112.267,38.816 r90 top
C42 "10nF" CAPC1608X87N 118.94,41.985 r0 top
C43 "1uF" CAPC1608X87N 118.944,39.38 r180 top
C44 "10uF" CAPMP3216X180N 110.325,40.307 r90 top
C45 "100nF" CAPC1005X55N 108.021,41.015 r270 top
C46 "10nF" CAPC1608X87N 109.569,16.23 r180 top
C47 "10uF" CAPMP3216X180N 118.594,36.18 r270 top
C48 "22uF" CAPC2012X135N 117.194,84.38 r270 top
C49 "22uF" CAPC2012X135N 116.944,75.63 r180 top
C50 "10uF" CAPMP3216X180N 116.444,73.38 r0 top
C51 "1uF" CAPC1608X87N 110.819,67.53 r90 top
C52 "10uF" CAPMP3216X180N 149.048,64.38 r180 top
C53 "22uF" CAPC2012X135N 151.694,71.88 r270 top
C54 "22uF" CAPC2012X135N 153.444,64.13 r180 top
C55 "22uF" CAPC2012X135N 144.753,62.901 r0 top
C56 "22uF" CAPC2012X135N 144.753,60.742 r0 top
C57 "22uF" CAPC2012X135N 144.804,57.872 r0 top
C58 "22uF" CAPC2012X135N 123.194,62.63 r0 top
C59 "22uF" CAPC2012X135N 120.194,63.63 r90 top
C60 "10uF" CAPMP3216X180N 117.194,57.88 r90 top
C61 "1uF" CAPC1608X87N 116.694,22.63 r90 top
C62 "10uF" CAPMP3216X180N 118.694,22.63 r90 top
C63 "10uF" CAPMP3216X180N 106.444,21.63 r0 top
C64 "100nF" CAPC1005X55N 109.444,21.88 r270 top
C65 "1uF" CAPC1608X87N 116.194,11.88 r270 top
C66 "1uF" CAPC1608X87N 132.391,64.77 r270 top
C67 "10uF" CAPMP3216X180N 140.869,48.164 r180 top
C68 "22uF" CAPC2012X135N 106.944,32.13 r0 top
C69 "100nF" CAPC1005X55N 142.512,59.044 r90 top
C70 "22uF" CAPC2012X135N 140.048,59.018 r0 top
C71 "1uF" CAPC1608X87N 103.86,37.28 r90 top
C72 "1uF" CAPC1608X87N 117.444,-0.37 r180 top
C73 "100nF" CAPC1005X55N 136.141,65.77 r180 top
C74 "22uF" CAPC2012X135N 134.409,64.555 r270 top
C75 "10nF" CAPC1608X87N 113.444,34.13 r90 top
C76 "100nF" CAPC1005X55N 108.771,36.772 r270 top
C77 "10uF" CAPMP3216X180N 105.817,39.994 r90 top
C78 "100nF" CAPC1005X55N 130.641,57.27 r90 top
C79 "22uF" CAPC2012X135N 124.161,57.37 r270 top
C80 "10uF" CAPMP3216X180N 122.944,47.88 r180 top
C81 "22uF" CAPC2012X135N 119.694,26.88 r270 top
C82 "10nF" CAPC1608X87N 107.694,27.63 r0 top
C83 "100nF" CAPC1005X55N 113.694,31.13 r180 top
C84 "10uF" CAPMP3216X180N 108.444,29.63 r180 top
C85 "100nF" CAPC1005X55N 134.391,59.02 r180 top
C86 "22uF" CAPC2012X135N 133.141,57.27 r0 top
C87 "100nF" CAPC1608X87N 95.432,30.835 r90 top
C88 "100nF" CAPC1608X87N 97.694,44.38 r270 top
C89 "100nF" CAPC1608X87N 93.933,30.835 r90 top
C90 "100nF" CAPC1608X87N 93.419,43.33 r180 top
C91 "10uF" CAPC2012X95N 92.155,30.657 r90 top
C92 "100nF" CAPC1608X87N 100.944,39.63 r270 top
C93 "100nF" CAPC1608X87N 101.194,35.705 r270 top
C94 "10uF" CAPC2012X95N 103.752,41.13 r270 top
C95 "10uF" CAPC2012X95N 97.444,30.38 r90 top
C96 "10uF" CAPC2012X95N 90.069,35.466 r90 top
C97 "10uF" CAPC2012X95N 90.069,38.895 r270 top
C98 "10uF" CAPC2012X95N 95.915,44.221 r270 top
C99 "10uF" CAPC2012X95N 96.374,21.802 r90 top
C100 "2.2uF" CAPC1608X87N 99.269,22.08 r270 top
C101 "1uF" CAPC1608X87N 96.714,11.566 r90 top
C102 "1uF" CAPC1608X87N 101.494,20.409 r180 top
C103 "47nF" CAPC2012X135N 96.844,65.58 r180 top
C104 "100nF" CAPC1005X55N 101.019,58.805 r270 top
C105 "100nF" CAPC1005X55N 92.769,55.905 r0 top
C106 "47nF" CAPC2012X135N 92.194,53.23 r90 top
C108 "100nF" CAPC1005X55N 178.908,4.718 r180 top
C109 "22uF" CAPC2012X135N 171.49,4.652 r180 top
C110 "100nF" CAPC1005X55N 168.9,8 r180 top
C111 "100nF" CAPC1005X55N 170.73,2.55 r180 top
C112 "1uF" CAPC1005X55N 156.63,3.75 r0 top
C113 "100nF" CAPC1005X55N 132.23,47.15 r90 top
C114 "10uF" CAPC2012X95N 165.33,77.85 r90 top
C115 "10uF" CAPC2012X95N 167.73,77.85 r90 top
C116 "10uF" CAPC2012X95N 190.1,83.7 r270 top
C117 "1uF" CAPC1608X87N 189.13,12.45 r270 top
C118 "4.7uF" CAPMP3216X180N 182.23,12.95 r90 top
C119 "100nF" CAPC1005X55N 142.5,-1.5 r0 top
C120 "100nF" CAPC1005X55N 138.13,6.25 r0 top
C121 "100nF" CAPC1005X55N 132.5,-1.5 r0 top
C122 "100nF" CAPC1005X55N 128.03,6.25 r0 top
C123 "100nF" CAPC1005X55N 178.731,-1.615 r180 top
CLIP1 "S1411-46R" CLIP_HOLLAND-SHIELDING_LC 27.444,79.88 r90 top
CLIP2 "S1411-46R" CLIP_HOLLAND-SHIELDING_LC 27.444,10.88 r90 top
CLIP3 "S1411-46R" CLIP_HOLLAND-SHIELDING_LC 102.444,26.88 r90 top
CLIP4 "S1411-46R" CLIP_HOLLAND-SHIELDING_LC 102.444,64.88 r90 top
CLIP5 "S1411-46R" CLIP_HOLLAND-SHIELDING_LC 27.444,27.88 r90 top
CLIP6 "S1411-46R" CLIP_HOLLAND-SHIELDING_LC 27.444,46.88 r90 top
CLIP7 "S1411-46R" CLIP_HOLLAND-SHIELDING_LC 27.444,65.88 r90 top
CLIP8 "S1411-46R" CLIP_HOLLAND-SHIELDING_LC 46.444,89.88 r180 top
CLIP9 "S1411-46R" CLIP_HOLLAND-SHIELDING_LC 69.444,89.88 r180 top
CLIP10 "S1411-46R" CLIP_HOLLAND-SHIELDING_LC 89.444,89.88 r180 top
CLIP11 "S1411-46R" CLIP_HOLLAND-SHIELDING_LC 102.444,82.88 r90 top
CLIP12 "S1411-46R" CLIP_HOLLAND-SHIELDING_LC 102.444,47.88 r90 top
CLIP13 "S1411-46R" CLIP_HOLLAND-SHIELDING_LC 34.444,-0.12 r180 top
CLIP14 "S1411-46R" CLIP_HOLLAND-SHIELDING_LC 94.444,-0.12 r180 top
CLIP15 "S1411-46R" CLIP_HOLLAND-SHIELDING_LC 102.444,7.88 r90 top
CLIP16 "S1411-46R" CLIP_HOLLAND-SHIELDING_LC 77.444,-0.12 r180 top
CLIP17 "S1411-46R" CLIP_HOLLAND-SHIELDING_LC 46.444,-0.12 r180 top
CLIP18 "S1411-46R" CLIP_HOLLAND-SHIELDING_LC 33.444,89.88 r180 top
D1A "BAV199" SOT95P240X110-3N 62.433,81.418 r270 top (schematic designator D1)
D1B "BAV199" SOT95P240X110-3N 62.433,71.418 r270 top (schematic designator D1)
D1C "BAV199" SOT95P240X110-3N 62.446,61.374 r270 top (schematic designator D1)
D1D "BAV199" SOT95P240X110-3N 62.433,51.418 r270 top (schematic designator D1)
D1E "BAV199" SOT95P240X110-3N 62.433,41.418 r270 top (schematic designator D1)
D1F "BAV199" SOT95P240X110-3N 62.433,31.418 r270 top (schematic designator D1)
D1G "BAV199" SOT95P240X110-3N 62.433,21.418 r270 top (schematic designator D1)
D1H "BAV199" SOT95P240X110-3N 62.433,11.418 r270 top (schematic designator D1)
D2A "BAV199" SOT95P240X110-3N 62.433,77.506 r90 top (schematic designator D2)
D2B "BAV199" SOT95P240X110-3N 62.433,67.506 r90 top (schematic designator D2)
D2C "BAV199" SOT95P240X110-3N 62.446,57.462 r90 top (schematic designator D2)
D2D "BAV199" SOT95P240X110-3N 62.433,47.506 r90 top (schematic designator D2)
D2E "BAV199" SOT95P240X110-3N 62.433,37.506 r90 top (schematic designator D2)
D2F "BAV199" SOT95P240X110-3N 62.433,27.506 r90 top (schematic designator D2)
D2G "BAV199" SOT95P240X110-3N 62.433,17.506 r90 top (schematic designator D2)
D2H "BAV199" SOT95P240X110-3N 62.433,7.506 r90 top (schematic designator D2)
D3 "Green, 3.2V, 140°" WL-SMSW_0603_L1.6W0.98H0.8 -3.7,80 r90 top
D4 "Green, 3.2V, 140°" WL-SMSW_0603_L1.6W0.98H0.8 -3.7,59 r270 bottom
D5 "SMBJ12A" DIOM5336X265N 78.294,87.13 r0 top
D6 "SMBJ12A" DIOM5336X265N 69.444,2.88 r180 top
D7 "1N4148WS" SODFL2512X100N 119.444,11.88 r270 top
D8 "1N4148WS" SODFL2512X100N 129.641,64.77 r0 top
D9 "1N4148WS" SODFL2512X100N 117.694,1.38 r180 top
D10 "1N4148WS" SODFL2512X100N 119.694,45.88 r180 top
D11 "PESD3V3L5UY" SOT65P210X110-6N 191.78,-0.45 r270 top
D12 "PESD3V3L5UY" SOT65P210X110-6N 189.83,2.65 r270 top
D13 "PESD3V3L5UY" SOT65P210X110-6N 191.78,6.45 r270 top
D14 "CDBU0520-HF" SOD-523F 159.1,5.6 r0 top
D15 "CDBU0520-HF" SOD-523F 159.13,3.75 r0 top
D16 "SMBJ12A" DIOM5336X265N 165.3,83.8 r90 top
D17 "BAT165" SOD2512X110N 185.73,15.754 r180 top
D18 "PESD3V3L5UY" SOT65P210X110-6N 172.3,14.1 r180 top
D19 "Green, 3.2V, 140°" WL-SMSW_0603_L1.6W0.98H0.8 -3.7,80 r270 bottom
D20 "Green, 3.2V, 140°" WL-SMSW_0603_L1.6W0.98H0.8 -3.7,59 r90 top
D21 "Green, 3.2V, 140°" WL-SMSW_0603_L1.6W0.98H0.8 -3.7,38 r270 bottom
D22 "Green, 3.2V, 140°" WL-SMSW_0603_L1.6W0.98H0.8 -3.73,83.1 r90 top
D23 "Green, 3.2V, 140°" WL-SMSW_0603_L1.6W0.98H0.8 -3.7,38 r90 top
D24 "Red, 2V, 140°" WL-SMSW_0603_L1.6W0.98H0.8 -3.73,83.1 r270 bottom
D25 "Green, 3.2V, 140°" WL-SMSW_0603_L1.6W0.98H0.8 -3.7,17 r270 bottom
D26 "Green, 3.2V, 140°" WL-SMSW_0603_L1.6W0.98H0.8 -3.7,17 r90 top
FL1 "10A/50VDC" FIL_MURATA_BNX02 178.025,83.15 r180 top
FTG1 "Use only in PCB" FIDUCIAL_TOP_C100-200 191.16,89.687 r90 top
FTG2 "Use only in PCB" FIDUCIAL_TOP_S100-200 9.83,-1.016 r90 top
FTG3 "Use only in PCB" FIDUCIAL_TOP_S100-200 190.673,90.157 r90 bottom
FTG4 "Use only in PCB" FIDUCIAL_TOP_S100-200 8.204,-1.016 r90 bottom
IC1A "OPA2197IDGKR" SOP65P490X110-8N 82.944,79.109 r90 top (schematic designator IC1)
IC1B "OPA2197IDGKR" SOP65P490X110-8N 82.944,69.109 r90 top (schematic designator IC1)
IC1C "OPA2197IDGKR" SOP65P490X110-8N 82.957,59.065 r90 top (schematic designator IC1)
IC1D "OPA2197IDGKR" SOP65P490X110-8N 82.944,49.109 r90 top (schematic designator IC1)
IC1E "OPA2197IDGKR" SOP65P490X110-8N 82.944,39.109 r90 top (schematic designator IC1)
IC1F "OPA2197IDGKR" SOP65P490X110-8N 82.944,29.109 r90 top (schematic designator IC1)
IC1G "OPA2197IDGKR" SOP65P490X110-8N 82.944,19.109 r90 top (schematic designator IC1)
IC1H "OPA2197IDGKR" SOP65P490X110-8N 82.944,9.109 r90 top (schematic designator IC1)
IC2A "AD8253ARMZ" SOP50P490X110-10N 68.275,79.767 r90 top (schematic designator IC2)
IC2B "AD8253ARMZ" SOP50P490X110-10N 68.275,69.767 r90 top (schematic designator IC2)
IC2C "AD8253ARMZ" SOP50P490X110-10N 68.288,59.723 r90 top (schematic designator IC2)
IC2D "AD8253ARMZ" SOP50P490X110-10N 68.275,49.767 r90 top (schematic designator IC2)
IC2E "AD8253ARMZ" SOP50P490X110-10N 68.275,39.767 r90 top (schematic designator IC2)
IC2F "AD8253ARMZ" SOP50P490X110-10N 68.275,29.767 r90 top (schematic designator IC2)
IC2G "AD8253ARMZ" SOP50P490X110-10N 68.275,19.767 r90 top (schematic designator IC2)
IC2H "AD8253ARMZ" SOP50P490X110-10N 68.275,9.767 r90 top (schematic designator IC2)
IC3 "PCF8574ADW" SOIC127P1030X265-16N 109.694,4.13 r90 top
IC4 "FIN1101K8X" SOP50P310X90-8N 160.5,63.2 r270 top
IC5 "FIN1101K8X" SOP50P310X90-8N 166,52 r90 top
IC6 "SN65LVDS2DBVR" SOT95P280X145-5N 166,34 r90 top
IC7 "SN65LVDS2DBVR" SOT95P280X145-5N 160.5,31 r90 top
IC8 "SN65LVDS2DBVR" SOT95P280X145-5N 166,26 r90 top
IC9 "SN65LVDS2DBVR" SOT95P280X145-5N 160.5,23 r90 top
IC10 "SN65LVDS1DBVT" SOT95P280X145-5N 166,18 r90 top
IC11 "SN65LVDS2DBVR" SOT95P280X145-5N 160.5,15 r90 top
IC12 "24AA02E48T-I/OT" SOT95P280X145-5N 142.5,1 r0 top
IC13 "FIN1101K8X" SOP50P310X90-8N 166,60 r90 top
IC14 "FIN1101K8X" SOP50P310X90-8N 160.5,54.5 r90 top
IC15 "FIN1101K8X" SOP50P310X90-8N 160.5,46 r90 top
IC16 "FIN1101K8X" SOP50P310X90-8N 166,42 r90 top
IC17 "FIN1101K8X" SOP50P310X90-8N 160.5,38 r90 top
IC18 "24AA02E48T-I/OT" SOT95P280X145-5N 132.5,1 r0 top
IC19 "SN74LV595APWT" SOP65P640X120-16N 97.629,76.747 r90 top
IC20 "SN74LV595APWT" SOP65P640X120-16N 94.449,5.462 r0 top
IC21 "LT1763CS8#PBF" SOIC127P600X175-8N 114.093,48.229 r0 top
IC22 "LT1761ES5-SD#TRMPBF" SOT95P280X100-5N 115.244,37.915 r180 top
IC23 "LT1761ES5-BYP#TRMPBF" SOT95P280X100-5N 115.194,41.469 r180 top
IC24 "LT1964EDD#PBF" LT-DD-8_V 109.569,18.634 r0 top
IC25 "CC6-1212DF-E" CC6-1212DF-E 144.614,67.615 r180 top
IC26 "LT1964ES5-SD#TRMPBF" SOT95P280X100-5N 113.694,22.88 r180 top
IC27 "LM393AD" SOIC127P600X175-8N 118.694,6.13 r270 top
IC28 "TPS62175DQC" SON50P200X300X80-11N-R94X250 137.192,63.415 r0 top
IC29 "LT1761ES5-SD#TRMPBF" SOT95P280X100-5N 106.244,35.182 r90 top
IC30 "LT1761ES5-BYP#TRMPBF" SOT95P280X100-5N 110.845,34.029 r90 top
IC31 "TPS62175DQC" SON50P200X300X80-11N-R94X250 131.641,60.02 r180 top
IC32 "LT1763CS8#PBF" SOIC127P600X175-8N 114.944,27.88 r0 top
IC33 "LTC6655CHLS8-4.096" LCCS127P500X500X145-8N 93.194,16.634 r90 top
IC34 "LTC6655BHMS8-4.096#PBF" SOP65P490X110-8N 98.269,16.705 r90 top
IC35 "OPA2197IDGKR" SOP65P490X110-8N 96.894,56.98 r0 top
IC36 "LTC2320HUKG-16#PBF" QFN50P700X800X80_HS-53M 95.614,37.415 r0 top
IC37 "74HC4066PW" SOP65P640X110-14N 178.901,7.775 r180 top
IC39 "TLC555ID" SOIC127P600X175-8N 165.73,4.45 r0 top
IC40 "LM75AIMM/NOPB" SOP65P490X109-8N 134.63,45.45 r90 top
IC41 "MIC5219-3.3YM5" SOT95P280X145-5N 185.73,12.55 r180 top
IC43 "24AA025E48-I/SN" SOIC127P600X175-8N 142.5,8.1 r180 top
IC44 "24AA025E48-I/SN" SOIC127P600X175-8N 132.5,8.1 r180 top
IC46 "74HC4066PW" SOP65P640X110-14N 178.731,1.442 r180 top
J1 "" 3M_N2530-6002RB 193.042,38.73 r270 top locked
J2 "" 3M_N2530-6002RB 174.272,38.756 r270 top locked
J4 "BNC" MOLEX_73251-3150 7.6,73.45 r0 top
J5 "BNC" MOLEX_73251-3150 7.6,52.45 r0 top
J6 "BNC" MOLEX_73251-3150 7.6,31.45 r0 top
J7 "BNC" MOLEX_73251-3150 7.605,10.45 r0 top
J8 "P1" AMPHENOL_10052825-101LF 206.719,3.95 r90 top locked
J9 "P6" AMPHENOL_10052838-101LF 206.719,82.95 r90 top locked
J10 "Mini-Fit Jr.™" MOLEX_39-30-0040 199.485,66.667 r270 top locked
L1A "2x6.5mH" IND_WURTH_WE-SL2 49.51,80.574 r0 top (schematic designator L1)
L1B "2x6.5mH" IND_WURTH_WE-SL2 49.51,70.574 r0 top (schematic designator L1)
L1C "2x6.5mH" IND_WURTH_WE-SL2 49.523,60.53 r0 top (schematic designator L1)
L1D "2x6.5mH" IND_WURTH_WE-SL2 49.51,50.574 r0 top (schematic designator L1)
L1E "2x6.5mH" IND_WURTH_WE-SL2 49.51,40.574 r0 top (schematic designator L1)
L1F "2x6.5mH" IND_WURTH_WE-SL2 49.51,30.574 r0 top (schematic designator L1)
L1G "2x6.5mH" IND_WURTH_WE-SL2 49.51,20.574 r0 top (schematic designator L1)
L1H "2x6.5mH" IND_WURTH_WE-SL2 49.51,10.574 r0 top (schematic designator L1)
L2 "10uH" IND_MURATA-PS_8400 116.944,79.63 r270 top
L3 "10uH" IND_MURATA-PS_8400 110.875,71.175 r180 top
L4 "10uH" IND_MURATA-PS_8400 149.048,59.995 r90 top
L5 "10uH" IND_MURATA-PS_8400 120.944,58.63 r270 top
L6 "10uH" IND_MURATA-PS_8400 110.8,64.375 r180 top
L7 "10uH" IND_MURATA-PS_8400 141.165,63.235 r270 top
L8 "10uH" IND_MURATA-PS_8400 141.571,53.129 r270 top
L9 "10uH" IND_MURATA-PS_8400 127.313,58.695 r270 top
L10 "10uH" IND_MURATA-PS_8400 124.626,51.53 r180 top
LD6 "Green" LED_KINGBRIGHT_KPH-1608CGCK 131.13,44.05 r90 top
LD7 "Green" LED_KINGBRIGHT_KPH-1608CGCK 139.03,39.75 r90 top
LD8 "Green" LED_KINGBRIGHT_KPH-1608CGCK 141.33,39.75 r90 top
M1 "Plated Hole" MTG300_600#1 152.925,-0.175 r0 top
M2 "Plated Hole" MTG300_600#2 152.944,88.88 r180 top
M3 "Plated Hole" MTG300_600#3 0.568,88.9 r0 top locked
M4 "Plated Hole" MTG300_600#3 0.568,0 r0 top locked
NUT1 "M3" BOSSARD_BN81-1400401_v 12.394,134.8 r0 top
NUT2 "M3" BOSSARD_BN81-1400401_v 4.194,134.8 r0 top
P1 "61300621121" 61300621121 11.93,76.45 r270 top
P2 "61300621121" 61300621121 11.93,32.45 r270 top
P5 "61302621121" 61302621121 17.93,45.45 r90 top
R1A "Undefined" RESC1608X55N 49.764,82.86 r0 top (schematic designator R1)
R1B "Undefined" RESC1608X55N 49.764,72.86 r0 top (schematic designator R1)
R1C "Undefined" RESC1608X55N 49.777,62.816 r0 top (schematic designator R1)
R1D "Undefined" RESC1608X55N 49.764,52.86 r0 top (schematic designator R1)
R1E "Undefined" RESC1608X55N 49.764,42.86 r0 top (schematic designator R1)
R1F "Undefined" RESC1608X55N 49.764,32.86 r0 top (schematic designator R1)
R1G "Undefined" RESC1608X55N 49.764,22.86 r0 top (schematic designator R1)
R1H "Undefined" RESC1608X55N 49.764,12.86 r0 top (schematic designator R1)
R2A "0" RESC1608X55N 55.352,82.56 r90 top (schematic designator R2)
R2B "0" RESC1608X55N 55.352,72.56 r90 top (schematic designator R2)
R2C "0" RESC1608X55N 55.365,62.516 r90 top (schematic designator R2)
R2D "0" RESC1608X55N 55.352,52.56 r90 top (schematic designator R2)
R2E "0" RESC1608X55N 55.352,42.56 r90 top (schematic designator R2)
R2F "0" RESC1608X55N 55.352,32.56 r90 top (schematic designator R2)
R2G "0" RESC1608X55N 55.352,22.56 r90 top (schematic designator R2)
R2H "0" RESC1608X55N 55.352,12.56 r90 top (schematic designator R2)
R3A "1k8" RESC1608X55N 59.162,83.322 r0 top (schematic designator R3)
R3B "1k8" RESC1608X55N 59.162,73.322 r0 top (schematic designator R3)
R3C "1k8" RESC1608X55N 59.175,63.278 r0 top (schematic designator R3)
R3D "1k8" RESC1608X55N 59.162,53.322 r0 top (schematic designator R3)
R3E "1k8" RESC1608X55N 59.162,43.322 r0 top (schematic designator R3)
R3F "1k8" RESC1608X55N 59.162,33.322 r0 top (schematic designator R3)
R3G "1k8" RESC1608X55N 59.162,23.322 r0 top (schematic designator R3)
R3H "1k8" RESC1608X55N 59.162,13.322 r0 top (schematic designator R3)
R4A "100k" RESC1608X55N 56.876,82.56 r90 top (schematic designator R4)
R4B "100k" RESC1608X55N 56.876,72.56 r90 top (schematic designator R4)
R4C "100k" RESC1608X55N 56.889,62.516 r90 top (schematic designator R4)
R4D "100k" RESC1608X55N 56.876,52.56 r90 top (schematic designator R4)
R4E "100k" RESC1608X55N 56.876,42.56 r90 top (schematic designator R4)
R4F "100k" RESC1608X55N 56.876,32.56 r90 top (schematic designator R4)
R4G "100k" RESC1608X55N 56.876,22.56 r90 top (schematic designator R4)
R4H "100k" RESC1608X55N 56.876,12.56 r90 top (schematic designator R4)
R5A "49R9" RESC6331X70N 42.694,81.205 r90 top (schematic designator R5)
R5B "49R9" RESC6331X70N 42.694,71.205 r90 top (schematic designator R5)
R5C "49R9" RESC6331X70N 42.707,61.161 r90 top (schematic designator R5)
R5D "49R9" RESC6331X70N 42.694,51.205 r90 top (schematic designator R5)
R5E "49R9" RESC6331X70N 42.694,41.205 r90 top (schematic designator R5)
R5F "49R9" RESC6331X70N 42.694,31.205 r90 top (schematic designator R5)
R5G "49R9" RESC6331X70N 42.694,21.205 r90 top (schematic designator R5)
R5H "49R9" RESC6331X70N 42.694,11.205 r90 top (schematic designator R5)
R6A "51" RESC1005X40N 85.603,77.956 r90 top (schematic designator R6)
R6B "51" RESC1005X40N 85.603,67.956 r90 top (schematic designator R6)
R6C "51" RESC1005X40N 85.616,57.912 r90 top (schematic designator R6)
R6D "51" RESC1005X40N 85.603,47.956 r90 top (schematic designator R6)
R6E "51" RESC1005X40N 85.603,37.956 r90 top (schematic designator R6)
R6F "51" RESC1005X40N 85.603,27.956 r90 top (schematic designator R6)
R6G "51" RESC1005X40N 85.603,17.956 r90 top (schematic designator R6)
R6H "51" RESC1005X40N 85.603,7.956 r90 top (schematic designator R6)
R7A "24k" RESC1608X55N 77.694,83.88 r180 top (schematic designator R7)
R7B "24k" RESC1608X55N 77.669,73.905 r180 top (schematic designator R7)
R7C "24k" RESC1608X55N 77.694,63.855 r180 top (schematic designator R7)
R7D "24k" RESC1608X55N 77.694,53.805 r180 top (schematic designator R7)
R7E "24k" RESC1608X55N 77.694,43.88 r180 top (schematic designator R7)
R7F "24k" RESC1608X55N 77.669,33.905 r180 top (schematic designator R7)
R7G "24k" RESC1608X55N 77.694,23.88 r180 top (schematic designator R7)
R7H "24k" RESC1608X55N 77.669,13.88 r180 top (schematic designator R7)
R8A "Undefined" RESC1608X55N 49.764,78.288 r0 top (schematic designator R8)
R8B "Undefined" RESC1608X55N 49.764,68.288 r0 top (schematic designator R8)
R8C "Undefined" RESC1608X55N 49.777,58.244 r0 top (schematic designator R8)
R8D "Undefined" RESC1608X55N 49.764,48.288 r0 top (schematic designator R8)
R8E "Undefined" RESC1608X55N 49.764,38.288 r0 top (schematic designator R8)
R8F "Undefined" RESC1608X55N 49.764,28.288 r0 top (schematic designator R8)
R8G "Undefined" RESC1608X55N 49.764,18.288 r0 top (schematic designator R8)
R8H "Undefined" RESC1608X55N 49.764,8.288 r0 top (schematic designator R8)
R9A "0" RESC1608X55N 55.352,79.512 r270 top (schematic designator R9)
R9B "0" RESC1608X55N 55.352,69.512 r270 top (schematic designator R9)
R9C "0" RESC1608X55N 55.365,59.468 r270 top (schematic designator R9)
R9D "0" RESC1608X55N 55.352,49.512 r270 top (schematic designator R9)
R9E "0" RESC1608X55N 55.352,39.512 r270 top (schematic designator R9)
R9F "0" RESC1608X55N 55.352,29.512 r270 top (schematic designator R9)
R9G "0" RESC1608X55N 55.352,19.512 r270 top (schematic designator R9)
R9H "0" RESC1608X55N 55.352,9.512 r270 top (schematic designator R9)
R10A "1k8" RESC1608X55N 59.162,78.496 r0 top (schematic designator R10)
R10B "1k8" RESC1608X55N 59.162,68.496 r0 top (schematic designator R10)
R10C "1k8" RESC1608X55N 59.175,58.452 r0 top (schematic designator R10)
R10D "1k8" RESC1608X55N 59.162,48.496 r0 top (schematic designator R10)
R10E "1k8" RESC1608X55N 59.162,38.496 r0 top (schematic designator R10)
R10F "1k8" RESC1608X55N 59.162,28.496 r0 top (schematic designator R10)
R10G "1k8" RESC1608X55N 59.162,18.496 r0 top (schematic designator R10)
R10H "1k8" RESC1608X55N 59.162,8.496 r0 top (schematic designator R10)
R11A "100k" RESC1608X55N 56.876,79.512 r270 top (schematic designator R11)
R11B "100k" RESC1608X55N 56.876,69.512 r270 top (schematic designator R11)
R11C "100k" RESC1608X55N 56.889,59.468 r270 top (schematic designator R11)
R11D "100k" RESC1608X55N 56.876,49.512 r270 top (schematic designator R11)
R11E "100k" RESC1608X55N 56.876,39.512 r270 top (schematic designator R11)
R11F "100k" RESC1608X55N 56.876,29.512 r270 top (schematic designator R11)
R11G "100k" RESC1608X55N 56.876,19.512 r270 top (schematic designator R11)
R11H "100k" RESC1608X55N 56.876,9.512 r270 top (schematic designator R11)
R12A "51" RESC1005X40N 85.603,82.206 r270 top (schematic designator R12)
R12B "51" RESC1005X40N 85.603,72.206 r270 top (schematic designator R12)
R12C "51" RESC1005X40N 85.616,62.162 r270 top (schematic designator R12)
R12D "51" RESC1005X40N 85.603,52.206 r270 top (schematic designator R12)
R12E "51" RESC1005X40N 85.603,42.206 r270 top (schematic designator R12)
R12F "51" RESC1005X40N 85.603,32.206 r270 top (schematic designator R12)
R12G "51" RESC1005X40N 85.603,22.206 r270 top (schematic designator R12)
R12H "51" RESC1005X40N 85.603,12.206 r270 top (schematic designator R12)
R13A "2k4" RESC1005X40N 85.444,84.205 r180 top (schematic designator R13)
R13B "2k4" RESC1005X40N 85.444,74.205 r180 top (schematic designator R13)
R13C "2k4" RESC1005X40N 85.457,64.161 r180 top (schematic designator R13)
R13D "2k4" RESC1005X40N 85.444,54.205 r180 top (schematic designator R13)
R13E "2k4" RESC1005X40N 85.444,44.205 r180 top (schematic designator R13)
R13F "2k4" RESC1005X40N 85.444,34.205 r180 top (schematic designator R13)
R13G "2k4" RESC1005X40N 85.444,24.205 r180 top (schematic designator R13)
R13H "2k4" RESC1005X40N 85.444,14.205 r180 top (schematic designator R13)
R14 "100" RESC1005X40N 162.55,63.2 r270 top
R15 "100" RESC1005X40N 168.5,34 r270 top
R16 "100" RESC1005X40N 162.55,31 r270 top
R17 "100" RESC1005X40N 168.5,26 r270 top
R18 "100" RESC1005X40N 162.55,23 r270 top
R19 "100" RESC1005X40N 163,15 r270 top
R20 "100" RESC1005X40N 164.21,60.004 r90 top
R21 "100" RESC1005X40N 158.79,54.241 r90 top
R22 "100" RESC1005X40N 158.44,45.82 r90 top
R23 "100" RESC1005X40N 164.226,41.965 r90 top
R24 "100" RESC1005X40N 158.671,38.041 r90 top
R25 "10k" RESC1005X40N 10.719,89.605 r180 top
R26 "220" RESC1608X55N 9.194,83.13 r90 top
R27 "10k" RESC1005X40N 12.144,89.155 r270 top
R28 "220" RESC1608X55N 11.444,83.28 r0 top
R29 "10k" RESC1005X40N 15.944,89.155 r270 top
R30 "220" RESC1608X55N 14.694,83.28 r0 top
R31 "10k" RESC1005X40N 19.33,89.25 r270 top
R32 "220" RESC1608X55N 18.944,83.28 r0 top
R33 "10k" RESC1005X40N 14.33,3.55 r90 top
R34 "220" RESC1608X55N 15.33,9.85 r270 top
R35 "220" RESC1608X55N 14.694,90.88 r0 top
R36 "10k" RESC1005X40N 17.93,3.55 r90 top
R37 "220" RESC1608X55N 18.93,9.85 r270 top
R38 "220" RESC1608X55N 11.694,90.88 r0 top
R39 "10k" RESC1005X40N 6.63,3.55 r90 top
R40 "220" RESC1608X55N 4.23,7.45 r0 top
R41 "Undefined" RESC1608X55N 105.444,80.88 r270 top
R42 "Undefined" RESC1608X55N 108.444,80.88 r270 top
R43 "10k" RESC1005X40N 10.53,3.55 r90 top
R44 "220" RESC1608X55N 4.2,25 r90 top
R46 "0" RESC1608X55N 4.669,87.002 r180 top
R47 "0" RESC1608X55N 5.796,0.505 r180 top
R48 "22" RESC1005X40N 186.95,6.561 r0 top
R49 "10M" RESC2113X55N 102.63,-1.85 r0 top
R50 "10M" RESC2113X55N 16.43,-1.55 r180 top
R51 "24k" RESC1608X55N 108.694,48.88 r180 top
R52 "2k7" RESC1608X55N 108.694,50.38 r0 top
R53 "2k7" RESC1608X55N 120.019,19.08 r0 top
R54 "24k" RESC1608X55N 112.217,41.68 r270 top
R55 "5k1" RESC1005X40N 113.819,44.091 r270 top
R56 "Undefined" RESC1608X55N 121.944,71.38 r270 top
R57 "0" RESC1005X40N 150.694,78.38 r90 top
R58 "36k" RESC1608X55N 121.813,74.899 r270 top
R59 "10k" RESC1005X40N 117.694,11.88 r270 top
R60 "2k4" RESC1005X40N 120.944,11.88 r90 top
R61 "24k" RESC1608X55N 110.694,22.88 r270 top
R62 "62k" RESC1005X40N 115.444,9.13 r90 top
R63 "2k7" RESC1608X55N 108.444,23.63 r0 top
R64 "24k" RESC1608X55N 129.491,62.795 r180 top
R65 "5k1" RESC1005X40N 119.944,1.38 r90 top
R66 "270k" RESC1608X55N 137.641,58.77 r270 top
R67 "24k" RESC1608X55N 122.194,6.13 r90 top
R68 "82k" RESC1608X55N 136.141,60.02 r90 top
R69 "5k1" RESC1005X40N 138.141,61.02 r180 top
R70 "51k" RESC1005X40N 110.194,36.63 r180 top
R71 "47k" RESC1005X40N 112.194,36.63 r180 top
R72 "33k" RESC1005X40N 134.391,60.52 r0 top
R73 "62k" RESC1005X40N 109.694,27.38 r270 top
R74 "5k1" RESC1005X40N 134.391,61.52 r180 top
R75 "20k" RESC1005X40N 110.694,27.38 r90 top
R76 "1k" RESC1608X55N 116.159,16.064 r270 top
R77 "82k" RESC1608X55N 99.394,30.955 r90 top
R78 "0" RESC1005X40N 97.944,46.38 r0 top
R79 "100" RESC1005X40N 100.194,43.13 r270 top
R80 "0" RESC1005X40N 98.482,13.013 r180 top
R81 "0" RESC1005X40N 97.948,20.938 r90 top
R82 "0" RESC1005X40N 101.219,18.655 r270 top
R83 "24k" RESC1608X55N 96.944,67.23 r180 top
R86 "Undefined" RESC1608X55N 106.244,83.98 r0 top
R90 "22" RESC1005X40N 186.93,0.35 r0 top
R91 "22" RESC1005X40N 186.93,1.55 r0 top
R92 "22" RESC1005X40N 187.063,9.339 r0 top
R93 "22" RESC1005X40N 186.93,-2.35 r0 top
R94 "22" RESC1005X40N 187.83,3.95 r0 top
R95 "22" RESC1005X40N 186.93,-1.45 r0 top
R96 "22" RESC1005X40N 187.71,7.515 r0 top
R97 "22" RESC1005X40N 187.83,5.786 r0 top
R98 "22" RESC1005X40N 186.93,-0.55 r0 top
R99 "22" RESC1005X40N 186.97,4.95 r0 top
R100 "0" RESC1005X40N 194.94,14.841 r90 top
R101 "220" RESC1005X40N 173.43,0.15 r0 top
R102 "10k" RESC1005X40N 166.43,0.55 r180 top
R103 "10k" RESC1005X40N 183.601,5.775 r0 top
R104 "10k" RESC1005X40N 187.83,2.95 r180 top
R105 "10k" RESC1005X40N 174.13,8.45 r0 top
R106 "10k" RESC1005X40N 174.13,9.55 r0 top
R107 "10k" RESC1005X40N 183.63,4.65 r180 top
R108 "2k7" RESC1005X40N 174.13,10.65 r180 top
R109 "10k" RESC1005X40N 183.601,9.075 r180 top
R110 "0" RESC1005X40N 160.63,2.55 r0 top
R111 "0" RESC1005X40N 158.23,-0.65 r180 top
R112 "2k7" RESC1005X40N 174.13,11.75 r180 top
R113 "10k" RESC1005X40N 158.43,2.55 r180 top